# EAGLE board APDS-9960_RGB_and_Gesture_Sensor-Panel-v10 (EAGLE 7.1.0), part 1 of 3
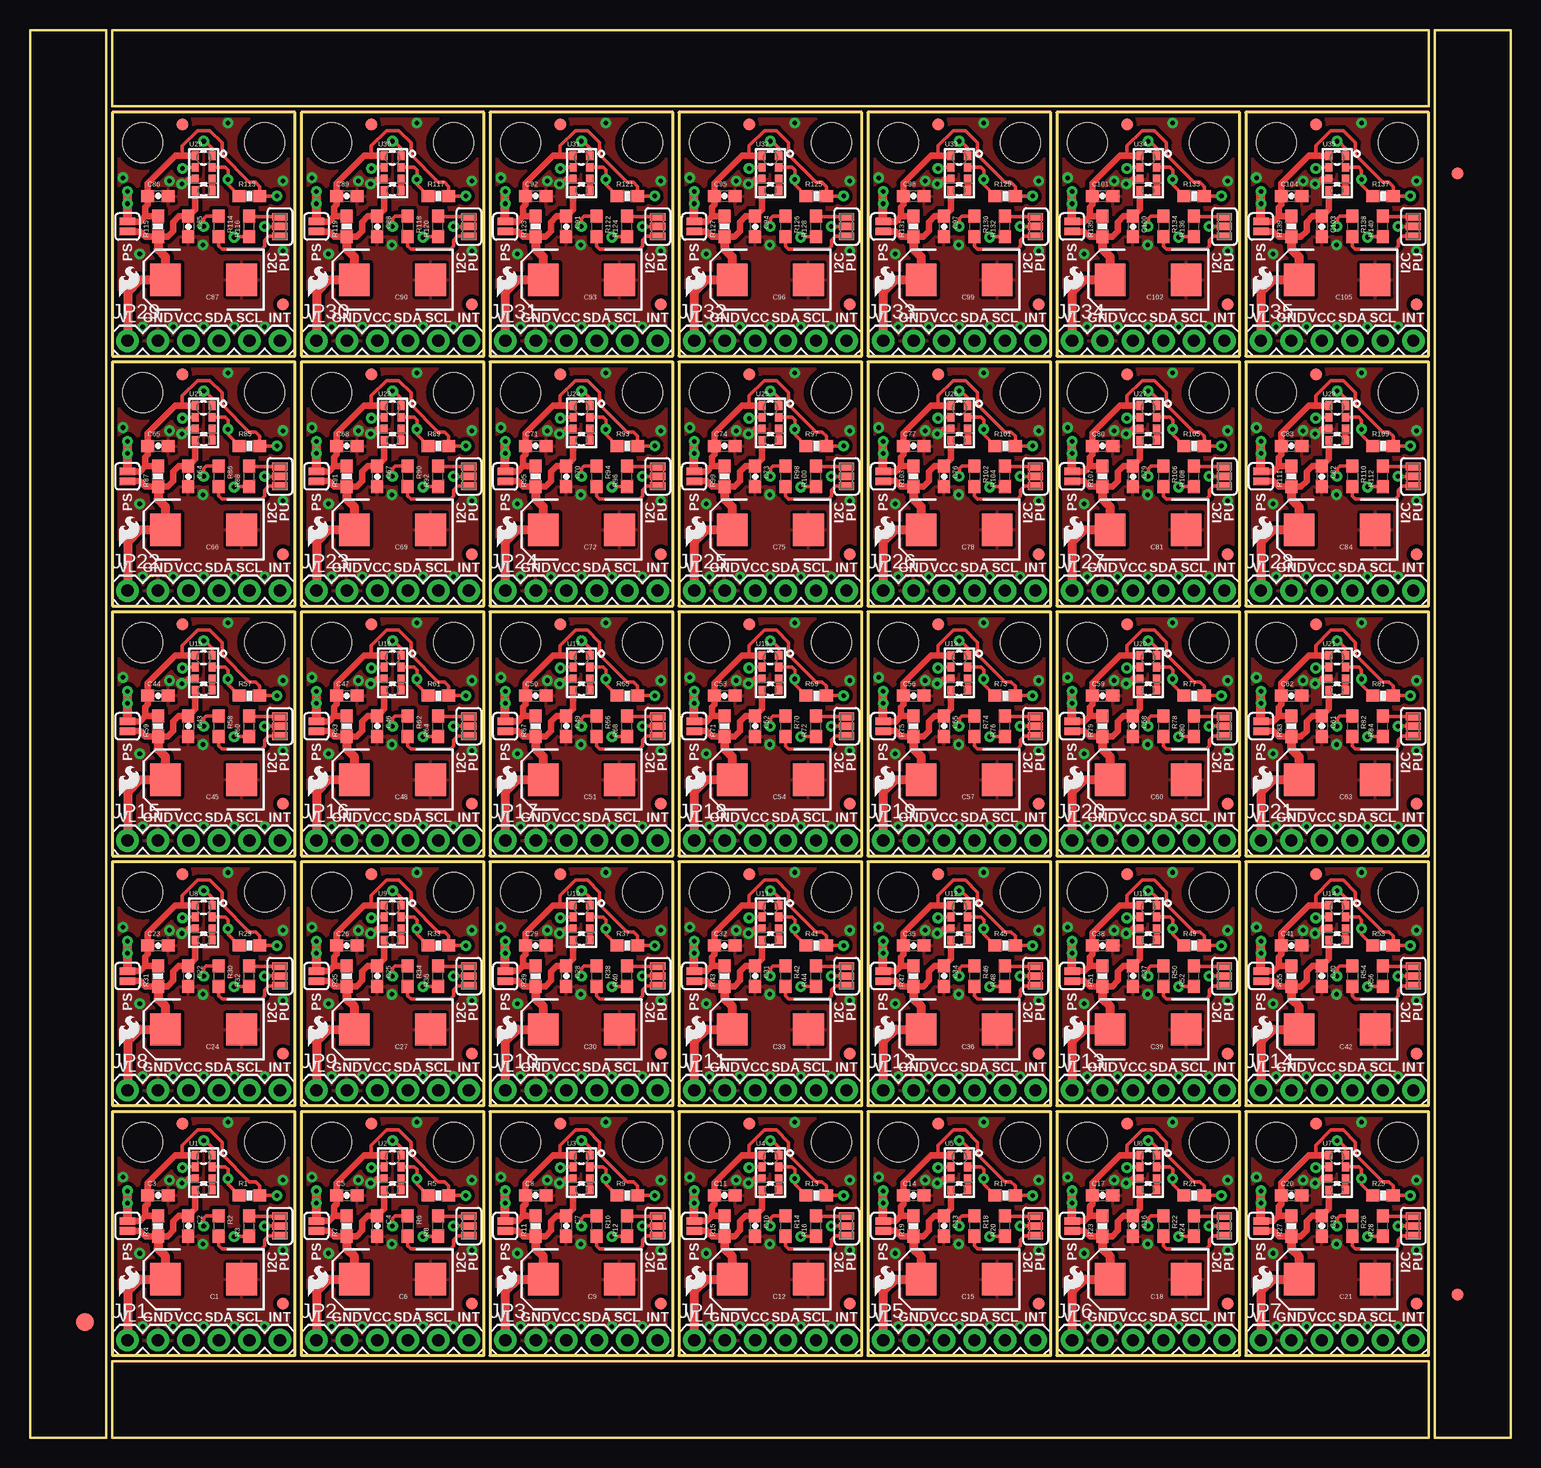
[diagram p0: board, top side]
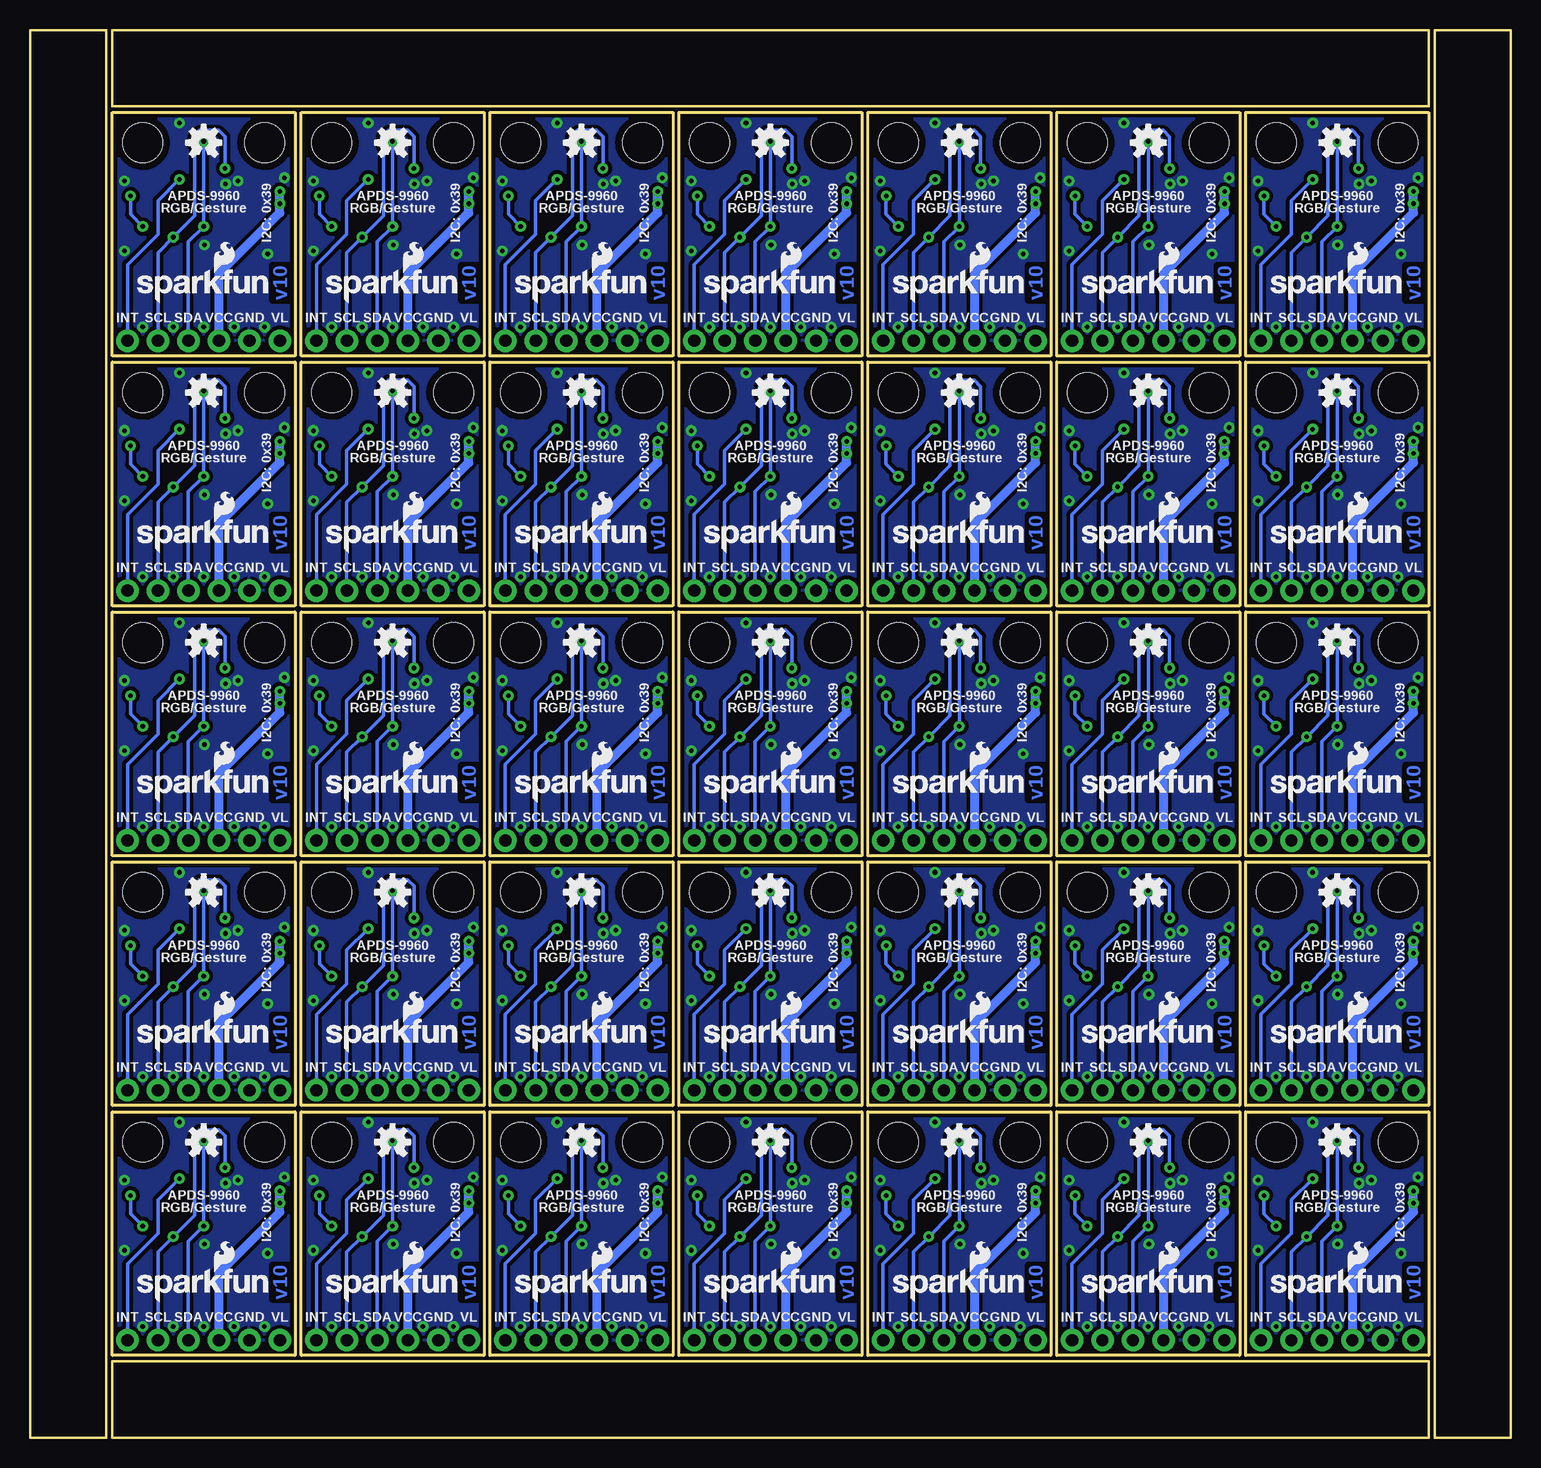
[diagram p1: board, bottom side, seen from below]

Size 123.44 x 117.35 mm. Coordinates in mm from the lower left corner, seen from the top.
Outline: 6.86,27.18 6.86,6.86 22.1,6.86 22.1,27.18 6.86,27.18
Outline: 22.61,27.18 22.61,6.86 37.85,6.86 37.85,27.18 22.61,27.18
Outline: 38.35,27.18 38.35,6.86 53.59,6.86 53.59,27.18 38.35,27.18
Outline: 54.1,27.18 54.1,6.86 69.34,6.86 69.34,27.18 54.1,27.18
Outline: 69.85,27.18 69.85,6.86 85.09,6.86 85.09,27.18 69.85,27.18
Outline: 85.6,27.18 85.6,6.86 100.84,6.86 100.84,27.18 85.6,27.18
Outline: 101.35,27.18 101.35,6.86 116.59,6.86 116.59,27.18 101.35,27.18
Outline: 6.86,48.01 6.86,27.69 22.1,27.69 22.1,48.01 6.86,48.01
Outline: 22.61,48.01 22.61,27.69 37.85,27.69 37.85,48.01 22.61,48.01
Outline: 38.35,48.01 38.35,27.69 53.59,27.69 53.59,48.01 38.35,48.01
Outline: 54.1,48.01 54.1,27.69 69.34,27.69 69.34,48.01 54.1,48.01
Outline: 69.85,48.01 69.85,27.69 85.09,27.69 85.09,48.01 69.85,48.01
Outline: 85.6,48.01 85.6,27.69 100.84,27.69 100.84,48.01 85.6,48.01
Outline: 101.35,48.01 101.35,27.69 116.59,27.69 116.59,48.01 101.35,48.01
Outline: 6.86,68.83 6.86,48.51 22.1,48.51 22.1,68.83 6.86,68.83
Outline: 22.61,68.83 22.61,48.51 37.85,48.51 37.85,68.83 22.61,68.83
Outline: 38.35,68.83 38.35,48.51 53.59,48.51 53.59,68.83 38.35,68.83
Outline: 54.1,68.83 54.1,48.51 69.34,48.51 69.34,68.83 54.1,68.83
Outline: 69.85,68.83 69.85,48.51 85.09,48.51 85.09,68.83 69.85,68.83
Outline: 85.6,68.83 85.6,48.51 100.84,48.51 100.84,68.83 85.6,68.83
Outline: 101.35,68.83 101.35,48.51 116.59,48.51 116.59,68.83 101.35,68.83
Outline: 6.86,89.66 6.86,69.34 22.1,69.34 22.1,89.66 6.86,89.66
Outline: 22.61,89.66 22.61,69.34 37.85,69.34 37.85,89.66 22.61,89.66
Outline: 38.35,89.66 38.35,69.34 53.59,69.34 53.59,89.66 38.35,89.66
Outline: 54.1,89.66 54.1,69.34 69.34,69.34 69.34,89.66 54.1,89.66
Outline: 69.85,89.66 69.85,69.34 85.09,69.34 85.09,89.66 69.85,89.66
Outline: 85.6,89.66 85.6,69.34 100.84,69.34 100.84,89.66 85.6,89.66
Outline: 101.35,89.66 101.35,69.34 116.59,69.34 116.59,89.66 101.35,89.66
Outline: 6.86,110.49 6.86,90.17 22.1,90.17 22.1,110.49 6.86,110.49
Outline: 22.61,110.49 22.61,90.17 37.85,90.17 37.85,110.49 22.61,110.49
Outline: 38.35,110.49 38.35,90.17 53.59,90.17 53.59,110.49 38.35,110.49
Outline: 54.1,110.49 54.1,90.17 69.34,90.17 69.34,110.49 54.1,110.49
Outline: 69.85,110.49 69.85,90.17 85.09,90.17 85.09,110.49 69.85,110.49
Outline: 85.6,110.49 85.6,90.17 100.84,90.17 100.84,110.49 85.6,110.49
Outline: 101.35,110.49 101.35,90.17 116.59,90.17 116.59,110.49 101.35,110.49
Outline: 6.35,0 6.35,117.35 0,117.35 0,0 6.35,0
Outline: 6.86,0 116.59,0 116.59,6.35 6.86,6.35 6.86,0
Outline: 123.44,0 123.44,117.35 117.09,117.35 117.09,0 123.44,0
Outline: 116.59,117.35 6.86,117.35 6.86,111 116.59,111 116.59,117.35
Copper layers (1*16): Top 0.035mm / dielectric 1.5mm / Bottom 0.035mm
Design rules "SparkFun-2-layer": minimum track width 7mil, minimum drill 15mil, track to track 8mil, track to pad 8mil, pad to pad 8mil, via to via 8mil, smd to smd 8mil, copper to edge 8mil, drill to drill 8mil, minimum pad ring 12mil, minimum via ring 10mil, stop-mask expansion 4mil, vias tented up to drill 20mil, thermal gap 10mil

## Footprints (pad centres in the part's own frame; a part is rotated, then mirrored left to right if it is on the bottom)
EIA7343 = smd 2.55 x 2.7: A 3.17,0; C -3.17,0
0603-CAP = smd 1.1 x 1: 1 -0.85,0; 2 0.85,0
FIDUCIAL-1.5X3 = smd 1.5 x 1.5: 1 0,0
FIDUCIAL-1X2 = smd 1 x 1: 1 0,0
1X06 = drill 1.016 pad 1.88: 1 0,0; 2 2.54,0; 3 5.08,0; 4 7.62,0; 5 10.16,0; 6 12.7,0
0603-RES = smd 1.1 x 1: 1 -0.85,0; 2 0.85,0
0603 = smd 1.1 x 1: 1 -0.85,0; 2 0.85,0
SJ_3_PASTE1&2&3 = smd 0.635 x 1.27: 1 -0.813,0; 2 0,0; 3 0.813,0
SJ_2S = smd 0.635 x 1.27: 1 -0.412,0; 2 0.412,0
STAND-OFF = hole 3.302: 0,0
APDS-9960 = smd 0.6 x 0.72: 1 0.7,1.455; 2 0.7,0.485; 3 0.7,-0.485; 4 0.7,-1.455; 5 -0.7,-1.455; 6 -0.7,-0.485; 7 -0.7,0.485; 8 -0.7,1.455

## Placement (x,y rotation side)
C1  100uF  [EIA7343]  14.48,13.21 180 top
C2  1.0uF  [0603-CAP]  13.21,17.65 270 top
C3  1.0uF  [0603-CAP]  10.67,20.19 0 top
C4  1.0uF  [0603-CAP]  28.96,17.65 270 top
C5  1.0uF  [0603-CAP]  26.42,20.19 0 top
C6  100uF  [EIA7343]  30.23,13.21 180 top
C7  1.0uF  [0603-CAP]  44.7,17.65 270 top
C8  1.0uF  [0603-CAP]  42.16,20.19 0 top
C9  100uF  [EIA7343]  45.97,13.21 180 top
C10  1.0uF  [0603-CAP]  60.45,17.65 270 top
C11  1.0uF  [0603-CAP]  57.91,20.19 0 top
C12  100uF  [EIA7343]  61.72,13.21 180 top
C13  1.0uF  [0603-CAP]  76.2,17.65 270 top
C14  1.0uF  [0603-CAP]  73.66,20.19 0 top
C15  100uF  [EIA7343]  77.47,13.21 180 top
C16  1.0uF  [0603-CAP]  91.95,17.65 270 top
C17  1.0uF  [0603-CAP]  89.41,20.19 0 top
C18  100uF  [EIA7343]  93.22,13.21 180 top
C19  1.0uF  [0603-CAP]  107.7,17.65 270 top
C20  1.0uF  [0603-CAP]  105.16,20.19 0 top
C21  100uF  [EIA7343]  108.97,13.21 180 top
C22  1.0uF  [0603-CAP]  13.21,38.48 270 top
C23  1.0uF  [0603-CAP]  10.67,41.02 0 top
C24  100uF  [EIA7343]  14.48,34.04 180 top
C25  1.0uF  [0603-CAP]  28.96,38.48 270 top
C26  1.0uF  [0603-CAP]  26.42,41.02 0 top
C27  100uF  [EIA7343]  30.23,34.04 180 top
C28  1.0uF  [0603-CAP]  44.7,38.48 270 top
C29  1.0uF  [0603-CAP]  42.16,41.02 0 top
C30  100uF  [EIA7343]  45.97,34.04 180 top
C31  1.0uF  [0603-CAP]  60.45,38.48 270 top
C32  1.0uF  [0603-CAP]  57.91,41.02 0 top
C33  100uF  [EIA7343]  61.72,34.04 180 top
C34  1.0uF  [0603-CAP]  76.2,38.48 270 top
C35  1.0uF  [0603-CAP]  73.66,41.02 0 top
C36  100uF  [EIA7343]  77.47,34.04 180 top
C37  1.0uF  [0603-CAP]  91.95,38.48 270 top
C38  1.0uF  [0603-CAP]  89.41,41.02 0 top
C39  100uF  [EIA7343]  93.22,34.04 180 top
C40  1.0uF  [0603-CAP]  107.7,38.48 270 top
C41  1.0uF  [0603-CAP]  105.16,41.02 0 top
C42  100uF  [EIA7343]  108.97,34.04 180 top
C43  1.0uF  [0603-CAP]  13.21,59.31 270 top
C44  1.0uF  [0603-CAP]  10.67,61.85 0 top
C45  100uF  [EIA7343]  14.48,54.86 180 top
C46  1.0uF  [0603-CAP]  28.96,59.31 270 top
C47  1.0uF  [0603-CAP]  26.42,61.85 0 top
C48  100uF  [EIA7343]  30.23,54.86 180 top
C49  1.0uF  [0603-CAP]  44.7,59.31 270 top
C50  1.0uF  [0603-CAP]  42.16,61.85 0 top
C51  100uF  [EIA7343]  45.97,54.86 180 top
C52  1.0uF  [0603-CAP]  60.45,59.31 270 top
C53  1.0uF  [0603-CAP]  57.91,61.85 0 top
C54  100uF  [EIA7343]  61.72,54.86 180 top
C55  1.0uF  [0603-CAP]  76.2,59.31 270 top
C56  1.0uF  [0603-CAP]  73.66,61.85 0 top
C57  100uF  [EIA7343]  77.47,54.86 180 top
C58  1.0uF  [0603-CAP]  91.95,59.31 270 top
C59  1.0uF  [0603-CAP]  89.41,61.85 0 top
C60  100uF  [EIA7343]  93.22,54.86 180 top
C61  1.0uF  [0603-CAP]  107.7,59.31 270 top
C62  1.0uF  [0603-CAP]  105.16,61.85 0 top
C63  100uF  [EIA7343]  108.97,54.86 180 top
C64  1.0uF  [0603-CAP]  13.21,80.14 270 top
C65  1.0uF  [0603-CAP]  10.67,82.68 0 top
C66  100uF  [EIA7343]  14.48,75.69 180 top
C67  1.0uF  [0603-CAP]  28.96,80.14 270 top
C68  1.0uF  [0603-CAP]  26.42,82.68 0 top
C69  100uF  [EIA7343]  30.23,75.69 180 top
C70  1.0uF  [0603-CAP]  44.7,80.14 270 top
C71  1.0uF  [0603-CAP]  42.16,82.68 0 top
C72  100uF  [EIA7343]  45.97,75.69 180 top
C73  1.0uF  [0603-CAP]  60.45,80.14 270 top
C74  1.0uF  [0603-CAP]  57.91,82.68 0 top
C75  100uF  [EIA7343]  61.72,75.69 180 top
C76  1.0uF  [0603-CAP]  76.2,80.14 270 top
C77  1.0uF  [0603-CAP]  73.66,82.68 0 top
C78  100uF  [EIA7343]  77.47,75.69 180 top
C79  1.0uF  [0603-CAP]  91.95,80.14 270 top
C80  1.0uF  [0603-CAP]  89.41,82.68 0 top
C81  100uF  [EIA7343]  93.22,75.69 180 top
C82  1.0uF  [0603-CAP]  107.7,80.14 270 top
C83  1.0uF  [0603-CAP]  105.16,82.68 0 top
C84  100uF  [EIA7343]  108.97,75.69 180 top
C85  1.0uF  [0603-CAP]  13.21,100.97 270 top
C86  1.0uF  [0603-CAP]  10.67,103.5 0 top
C87  100uF  [EIA7343]  14.48,96.52 180 top
C88  1.0uF  [0603-CAP]  28.96,100.97 270 top
C89  1.0uF  [0603-CAP]  26.42,103.5 0 top
C90  100uF  [EIA7343]  30.23,96.52 180 top
C91  1.0uF  [0603-CAP]  44.7,100.97 270 top
C92  1.0uF  [0603-CAP]  42.16,103.5 0 top
C93  100uF  [EIA7343]  45.97,96.52 180 top
C94  1.0uF  [0603-CAP]  60.45,100.97 270 top
C95  1.0uF  [0603-CAP]  57.91,103.5 0 top
C96  100uF  [EIA7343]  61.72,96.52 180 top
C97  1.0uF  [0603-CAP]  76.2,100.97 270 top
C98  1.0uF  [0603-CAP]  73.66,103.5 0 top
C99  100uF  [EIA7343]  77.47,96.52 180 top
C100  1.0uF  [0603-CAP]  91.95,100.97 270 top
C101  1.0uF  [0603-CAP]  89.41,103.5 0 top
C102  100uF  [EIA7343]  93.22,96.52 180 top
C103  1.0uF  [0603-CAP]  107.7,100.97 270 top
C104  1.0uF  [0603-CAP]  105.16,103.5 0 top
C105  100uF  [EIA7343]  108.97,96.52 180 top
E$1  [FIDUCIAL-1.5X3]  4.57,9.65 0 top
E$4  [FIDUCIAL-1X2]  119,11.94 0 top
E$6  [FIDUCIAL-1X2]  119,105.41 180 top
FID1  FIDUCIAL1X2  [FIDUCIAL-1X2]  21.08,11.18 0 top
FID2  FIDUCIAL1X2  [FIDUCIAL-1X2]  12.7,26.16 0 top
FID3  FIDUCIAL1X2  [FIDUCIAL-1X2]  36.83,11.18 0 top
FID4  FIDUCIAL1X2  [FIDUCIAL-1X2]  28.45,26.16 0 top
FID5  FIDUCIAL1X2  [FIDUCIAL-1X2]  52.58,11.18 0 top
FID6  FIDUCIAL1X2  [FIDUCIAL-1X2]  44.2,26.16 0 top
FID7  FIDUCIAL1X2  [FIDUCIAL-1X2]  68.33,11.18 0 top
FID8  FIDUCIAL1X2  [FIDUCIAL-1X2]  59.94,26.16 0 top
FID9  FIDUCIAL1X2  [FIDUCIAL-1X2]  84.07,11.18 0 top
FID10  FIDUCIAL1X2  [FIDUCIAL-1X2]  75.69,26.16 0 top
FID11  FIDUCIAL1X2  [FIDUCIAL-1X2]  99.82,11.18 0 top
FID12  FIDUCIAL1X2  [FIDUCIAL-1X2]  91.44,26.16 0 top
FID13  FIDUCIAL1X2  [FIDUCIAL-1X2]  115.57,11.18 0 top
FID14  FIDUCIAL1X2  [FIDUCIAL-1X2]  107.19,26.16 0 top
FID15  FIDUCIAL1X2  [FIDUCIAL-1X2]  21.08,32 0 top
FID16  FIDUCIAL1X2  [FIDUCIAL-1X2]  12.7,46.99 0 top
FID17  FIDUCIAL1X2  [FIDUCIAL-1X2]  36.83,32 0 top
FID18  FIDUCIAL1X2  [FIDUCIAL-1X2]  28.45,46.99 0 top
FID19  FIDUCIAL1X2  [FIDUCIAL-1X2]  52.58,32 0 top
FID20  FIDUCIAL1X2  [FIDUCIAL-1X2]  44.2,46.99 0 top
FID21  FIDUCIAL1X2  [FIDUCIAL-1X2]  68.33,32 0 top
FID22  FIDUCIAL1X2  [FIDUCIAL-1X2]  59.94,46.99 0 top
FID23  FIDUCIAL1X2  [FIDUCIAL-1X2]  84.07,32 0 top
FID24  FIDUCIAL1X2  [FIDUCIAL-1X2]  75.69,46.99 0 top
FID25  FIDUCIAL1X2  [FIDUCIAL-1X2]  99.82,32 0 top
FID26  FIDUCIAL1X2  [FIDUCIAL-1X2]  91.44,46.99 0 top
FID27  FIDUCIAL1X2  [FIDUCIAL-1X2]  115.57,32 0 top
FID28  FIDUCIAL1X2  [FIDUCIAL-1X2]  107.19,46.99 0 top
FID29  FIDUCIAL1X2  [FIDUCIAL-1X2]  21.08,52.83 0 top
FID30  FIDUCIAL1X2  [FIDUCIAL-1X2]  12.7,67.82 0 top
FID31  FIDUCIAL1X2  [FIDUCIAL-1X2]  36.83,52.83 0 top
FID32  FIDUCIAL1X2  [FIDUCIAL-1X2]  28.45,67.82 0 top
FID33  FIDUCIAL1X2  [FIDUCIAL-1X2]  52.58,52.83 0 top
FID34  FIDUCIAL1X2  [FIDUCIAL-1X2]  44.2,67.82 0 top
FID35  FIDUCIAL1X2  [FIDUCIAL-1X2]  68.33,52.83 0 top
FID36  FIDUCIAL1X2  [FIDUCIAL-1X2]  59.94,67.82 0 top
FID37  FIDUCIAL1X2  [FIDUCIAL-1X2]  84.07,52.83 0 top
FID38  FIDUCIAL1X2  [FIDUCIAL-1X2]  75.69,67.82 0 top
FID39  FIDUCIAL1X2  [FIDUCIAL-1X2]  99.82,52.83 0 top
FID40  FIDUCIAL1X2  [FIDUCIAL-1X2]  91.44,67.82 0 top
FID41  FIDUCIAL1X2  [FIDUCIAL-1X2]  115.57,52.83 0 top
FID42  FIDUCIAL1X2  [FIDUCIAL-1X2]  107.19,67.82 0 top
FID43  FIDUCIAL1X2  [FIDUCIAL-1X2]  21.08,73.66 0 top
FID44  FIDUCIAL1X2  [FIDUCIAL-1X2]  12.7,88.65 0 top
FID45  FIDUCIAL1X2  [FIDUCIAL-1X2]  36.83,73.66 0 top
FID46  FIDUCIAL1X2  [FIDUCIAL-1X2]  28.45,88.65 0 top
FID47  FIDUCIAL1X2  [FIDUCIAL-1X2]  52.58,73.66 0 top
FID48  FIDUCIAL1X2  [FIDUCIAL-1X2]  44.2,88.65 0 top
FID49  FIDUCIAL1X2  [FIDUCIAL-1X2]  68.33,73.66 0 top
FID50  FIDUCIAL1X2  [FIDUCIAL-1X2]  59.94,88.65 0 top
FID51  FIDUCIAL1X2  [FIDUCIAL-1X2]  84.07,73.66 0 top
FID52  FIDUCIAL1X2  [FIDUCIAL-1X2]  75.69,88.65 0 top
FID53  FIDUCIAL1X2  [FIDUCIAL-1X2]  99.82,73.66 0 top
FID54  FIDUCIAL1X2  [FIDUCIAL-1X2]  91.44,88.65 0 top
FID55  FIDUCIAL1X2  [FIDUCIAL-1X2]  115.57,73.66 0 top
FID56  FIDUCIAL1X2  [FIDUCIAL-1X2]  107.19,88.65 0 top
FID57  FIDUCIAL1X2  [FIDUCIAL-1X2]  21.08,94.49 0 top
FID58  FIDUCIAL1X2  [FIDUCIAL-1X2]  12.7,109.47 0 top
FID59  FIDUCIAL1X2  [FIDUCIAL-1X2]  36.83,94.49 0 top
FID60  FIDUCIAL1X2  [FIDUCIAL-1X2]  28.45,109.47 0 top
FID61  FIDUCIAL1X2  [FIDUCIAL-1X2]  52.58,94.49 0 top
FID62  FIDUCIAL1X2  [FIDUCIAL-1X2]  44.2,109.47 0 top
FID63  FIDUCIAL1X2  [FIDUCIAL-1X2]  68.33,94.49 0 top
FID64  FIDUCIAL1X2  [FIDUCIAL-1X2]  59.94,109.47 0 top
FID65  FIDUCIAL1X2  [FIDUCIAL-1X2]  84.07,94.49 0 top
FID66  FIDUCIAL1X2  [FIDUCIAL-1X2]  75.69,109.47 0 top
FID67  FIDUCIAL1X2  [FIDUCIAL-1X2]  99.82,94.49 0 top
FID68  FIDUCIAL1X2  [FIDUCIAL-1X2]  91.44,109.47 0 top
FID69  FIDUCIAL1X2  [FIDUCIAL-1X2]  115.57,94.49 0 top
FID70  FIDUCIAL1X2  [FIDUCIAL-1X2]  107.19,109.47 0 top
JP1  [1X06]  8.13,8.13 0 top
JP2  [1X06]  23.88,8.13 0 top
JP3  [1X06]  39.62,8.13 0 top
JP4  [1X06]  55.37,8.13 0 top
JP5  [1X06]  71.12,8.13 0 top
JP6  [1X06]  86.87,8.13 0 top
JP7  [1X06]  102.62,8.13 0 top
JP8  [1X06]  8.13,28.96 0 top
JP9  [1X06]  23.88,28.96 0 top
JP10  [1X06]  39.62,28.96 0 top
JP11  [1X06]  55.37,28.96 0 top
JP12  [1X06]  71.12,28.96 0 top
JP13  [1X06]  86.87,28.96 0 top
JP14  [1X06]  102.62,28.96 0 top
JP15  [1X06]  8.13,49.78 0 top
JP16  [1X06]  23.88,49.78 0 top
JP17  [1X06]  39.62,49.78 0 top
JP18  [1X06]  55.37,49.78 0 top
JP19  [1X06]  71.12,49.78 0 top
JP20  [1X06]  86.87,49.78 0 top
JP21  [1X06]  102.62,49.78 0 top
JP22  [1X06]  8.13,70.61 0 top
JP23  [1X06]  23.88,70.61 0 top
JP24  [1X06]  39.62,70.61 0 top
JP25  [1X06]  55.37,70.61 0 top
JP26  [1X06]  71.12,70.61 0 top
JP27  [1X06]  86.87,70.61 0 top
JP28  [1X06]  102.62,70.61 0 top
JP29  [1X06]  8.13,91.44 0 top
JP30  [1X06]  23.88,91.44 0 top
JP31  [1X06]  39.62,91.44 0 top
JP32  [1X06]  55.37,91.44 0 top
JP33  [1X06]  71.12,91.44 0 top
JP34  [1X06]  86.87,91.44 0 top
JP35  [1X06]  102.62,91.44 0 top
LOGO1  SFE_LOGO_FLAME.1_INCH  [SFE_LOGO_FLAME_.1]  7.11,11.43 0 top
LOGO2  OSHW-LOGOS  [OSHW-LOGO-S]  14.48,24.64 0 bottom
LOGO3  SFE_LOGO_FLAME.1_INCH  [SFE_LOGO_FLAME_.1]  22.86,11.43 0 top
LOGO4  OSHW-LOGOS  [OSHW-LOGO-S]  30.23,24.64 0 bottom
LOGO5  SFE_LOGO_FLAME.1_INCH  [SFE_LOGO_FLAME_.1]  38.61,11.43 0 top
LOGO6  OSHW-LOGOS  [OSHW-LOGO-S]  45.97,24.64 0 bottom
LOGO7  SFE_LOGO_FLAME.1_INCH  [SFE_LOGO_FLAME_.1]  54.36,11.43 0 top
LOGO8  OSHW-LOGOS  [OSHW-LOGO-S]  61.72,24.64 0 bottom
LOGO9  SFE_LOGO_FLAME.1_INCH  [SFE_LOGO_FLAME_.1]  70.1,11.43 0 top
LOGO10  OSHW-LOGOS  [OSHW-LOGO-S]  77.47,24.64 0 bottom
LOGO11  SFE_LOGO_FLAME.1_INCH  [SFE_LOGO_FLAME_.1]  85.85,11.43 0 top
LOGO12  OSHW-LOGOS  [OSHW-LOGO-S]  93.22,24.64 0 bottom
LOGO13  SFE_LOGO_FLAME.1_INCH  [SFE_LOGO_FLAME_.1]  101.6,11.43 0 top
LOGO14  OSHW-LOGOS  [OSHW-LOGO-S]  108.97,24.64 0 bottom
LOGO15  SFE_LOGO_FLAME.1_INCH  [SFE_LOGO_FLAME_.1]  7.11,32.26 0 top
LOGO16  OSHW-LOGOS  [OSHW-LOGO-S]  14.48,45.47 0 bottom
LOGO17  SFE_LOGO_FLAME.1_INCH  [SFE_LOGO_FLAME_.1]  22.86,32.26 0 top
LOGO18  OSHW-LOGOS  [OSHW-LOGO-S]  30.23,45.47 0 bottom
LOGO19  SFE_LOGO_FLAME.1_INCH  [SFE_LOGO_FLAME_.1]  38.61,32.26 0 top
LOGO20  OSHW-LOGOS  [OSHW-LOGO-S]  45.97,45.47 0 bottom
LOGO21  SFE_LOGO_FLAME.1_INCH  [SFE_LOGO_FLAME_.1]  54.36,32.26 0 top
LOGO22  OSHW-LOGOS  [OSHW-LOGO-S]  61.72,45.47 0 bottom
LOGO23  SFE_LOGO_FLAME.1_INCH  [SFE_LOGO_FLAME_.1]  70.1,32.26 0 top
LOGO24  OSHW-LOGOS  [OSHW-LOGO-S]  77.47,45.47 0 bottom
LOGO25  SFE_LOGO_FLAME.1_INCH  [SFE_LOGO_FLAME_.1]  85.85,32.26 0 top
LOGO26  OSHW-LOGOS  [OSHW-LOGO-S]  93.22,45.47 0 bottom
LOGO27  SFE_LOGO_FLAME.1_INCH  [SFE_LOGO_FLAME_.1]  101.6,32.26 0 top
LOGO28  OSHW-LOGOS  [OSHW-LOGO-S]  108.97,45.47 0 bottom
LOGO29  SFE_LOGO_FLAME.1_INCH  [SFE_LOGO_FLAME_.1]  7.11,53.09 0 top
LOGO30  OSHW-LOGOS  [OSHW-LOGO-S]  14.48,66.29 0 bottom
LOGO31  SFE_LOGO_FLAME.1_INCH  [SFE_LOGO_FLAME_.1]  22.86,53.09 0 top
LOGO32  OSHW-LOGOS  [OSHW-LOGO-S]  30.23,66.29 0 bottom
LOGO33  SFE_LOGO_FLAME.1_INCH  [SFE_LOGO_FLAME_.1]  38.61,53.09 0 top
LOGO34  OSHW-LOGOS  [OSHW-LOGO-S]  45.97,66.29 0 bottom
LOGO35  SFE_LOGO_FLAME.1_INCH  [SFE_LOGO_FLAME_.1]  54.36,53.09 0 top
LOGO36  OSHW-LOGOS  [OSHW-LOGO-S]  61.72,66.29 0 bottom
LOGO37  SFE_LOGO_FLAME.1_INCH  [SFE_LOGO_FLAME_.1]  70.1,53.09 0 top
LOGO38  OSHW-LOGOS  [OSHW-LOGO-S]  77.47,66.29 0 bottom
LOGO39  SFE_LOGO_FLAME.1_INCH  [SFE_LOGO_FLAME_.1]  85.85,53.09 0 top
LOGO40  OSHW-LOGOS  [OSHW-LOGO-S]  93.22,66.29 0 bottom
LOGO41  SFE_LOGO_FLAME.1_INCH  [SFE_LOGO_FLAME_.1]  101.6,53.09 0 top
LOGO42  OSHW-LOGOS  [OSHW-LOGO-S]  108.97,66.29 0 bottom
LOGO43  SFE_LOGO_FLAME.1_INCH  [SFE_LOGO_FLAME_.1]  7.11,73.91 0 top
LOGO44  OSHW-LOGOS  [OSHW-LOGO-S]  14.48,87.12 0 bottom
LOGO45  SFE_LOGO_FLAME.1_INCH  [SFE_LOGO_FLAME_.1]  22.86,73.91 0 top
LOGO46  OSHW-LOGOS  [OSHW-LOGO-S]  30.23,87.12 0 bottom
LOGO47  SFE_LOGO_FLAME.1_INCH  [SFE_LOGO_FLAME_.1]  38.61,73.91 0 top
LOGO48  OSHW-LOGOS  [OSHW-LOGO-S]  45.97,87.12 0 bottom
LOGO49  SFE_LOGO_FLAME.1_INCH  [SFE_LOGO_FLAME_.1]  54.36,73.91 0 top
LOGO50  OSHW-LOGOS  [OSHW-LOGO-S]  61.72,87.12 0 bottom
LOGO51  SFE_LOGO_FLAME.1_INCH  [SFE_LOGO_FLAME_.1]  70.1,73.91 0 top
LOGO52  OSHW-LOGOS  [OSHW-LOGO-S]  77.47,87.12 0 bottom
LOGO53  SFE_LOGO_FLAME.1_INCH  [SFE_LOGO_FLAME_.1]  85.85,73.91 0 top
LOGO54  OSHW-LOGOS  [OSHW-LOGO-S]  93.22,87.12 0 bottom
LOGO55  SFE_LOGO_FLAME.1_INCH  [SFE_LOGO_FLAME_.1]  101.6,73.91 0 top
LOGO56  OSHW-LOGOS  [OSHW-LOGO-S]  108.97,87.12 0 bottom
LOGO57  SFE_LOGO_FLAME.1_INCH  [SFE_LOGO_FLAME_.1]  7.11,94.74 0 top
LOGO58  OSHW-LOGOS  [OSHW-LOGO-S]  14.48,107.95 0 bottom
LOGO59  SFE_LOGO_FLAME.1_INCH  [SFE_LOGO_FLAME_.1]  22.86,94.74 0 top
LOGO60  OSHW-LOGOS  [OSHW-LOGO-S]  30.23,107.95 0 bottom
LOGO61  SFE_LOGO_FLAME.1_INCH  [SFE_LOGO_FLAME_.1]  38.61,94.74 0 top
LOGO62  OSHW-LOGOS  [OSHW-LOGO-S]  45.97,107.95 0 bottom
LOGO63  SFE_LOGO_FLAME.1_INCH  [SFE_LOGO_FLAME_.1]  54.36,94.74 0 top
LOGO64  OSHW-LOGOS  [OSHW-LOGO-S]  61.72,107.95 0 bottom
LOGO65  SFE_LOGO_FLAME.1_INCH  [SFE_LOGO_FLAME_.1]  70.1,94.74 0 top
LOGO66  OSHW-LOGOS  [OSHW-LOGO-S]  77.47,107.95 0 bottom
LOGO67  SFE_LOGO_FLAME.1_INCH  [SFE_LOGO_FLAME_.1]  85.85,94.74 0 top
LOGO68  OSHW-LOGOS  [OSHW-LOGO-S]  93.22,107.95 0 bottom
LOGO69  SFE_LOGO_FLAME.1_INCH  [SFE_LOGO_FLAME_.1]  101.6,94.74 0 top
LOGO70  OSHW-LOGOS  [OSHW-LOGO-S]  108.97,107.95 0 bottom
R1  10k  [0603-RES]  18.29,20.19 0 top
R2  4.7k  [0603]  15.75,17.65 270 top
R3  4.7k  [0603]  18.29,17.65 90 top
R4  DNP  [0603-RES]  10.67,17.65 90 top
R5  10k  [0603-RES]  34.04,20.19 0 top
R6  4.7k  [0603]  31.5,17.65 270 top
R7  DNP  [0603-RES]  26.42,17.65 90 top
R8  4.7k  [0603]  34.04,17.65 90 top
R9  10k  [0603-RES]  49.78,20.19 0 top
R10  4.7k  [0603]  47.24,17.65 270 top
R11  DNP  [0603-RES]  42.16,17.65 90 top
R12  4.7k  [0603]  49.78,17.65 90 top
R13  10k  [0603-RES]  65.53,20.19 0 top
R14  4.7k  [0603]  62.99,17.65 270 top
R15  DNP  [0603-RES]  57.91,17.65 90 top
R16  4.7k  [0603]  65.53,17.65 90 top
R17  10k  [0603-RES]  81.28,20.19 0 top
R18  4.7k  [0603]  78.74,17.65 270 top
R19  DNP  [0603-RES]  73.66,17.65 90 top
R20  4.7k  [0603]  81.28,17.65 90 top
R21  10k  [0603-RES]  97.03,20.19 0 top
R22  4.7k  [0603]  94.49,17.65 270 top
R23  DNP  [0603-RES]  89.41,17.65 90 top
R24  4.7k  [0603]  97.03,17.65 90 top
R25  10k  [0603-RES]  112.78,20.19 0 top
R26  4.7k  [0603]  110.24,17.65 270 top
R27  DNP  [0603-RES]  105.16,17.65 90 top
R28  4.7k  [0603]  112.78,17.65 90 top
R29  10k  [0603-RES]  18.29,41.02 0 top
R30  4.7k  [0603]  15.75,38.48 270 top
R31  DNP  [0603-RES]  10.67,38.48 90 top
R32  4.7k  [0603]  18.29,38.48 90 top
R33  10k  [0603-RES]  34.04,41.02 0 top
R34  4.7k  [0603]  31.5,38.48 270 top
R35  DNP  [0603-RES]  26.42,38.48 90 top
R36  4.7k  [0603]  34.04,38.48 90 top
R37  10k  [0603-RES]  49.78,41.02 0 top
R38  4.7k  [0603]  47.24,38.48 270 top
R39  DNP  [0603-RES]  42.16,38.48 90 top
R40  4.7k  [0603]  49.78,38.48 90 top
R41  10k  [0603-RES]  65.53,41.02 0 top
R42  4.7k  [0603]  62.99,38.48 270 top
R43  DNP  [0603-RES]  57.91,38.48 90 top
R44  4.7k  [0603]  65.53,38.48 90 top
R45  10k  [0603-RES]  81.28,41.02 0 top
R46  4.7k  [0603]  78.74,38.48 270 top
R47  DNP  [0603-RES]  73.66,38.48 90 top
R48  4.7k  [0603]  81.28,38.48 90 top
R49  10k  [0603-RES]  97.03,41.02 0 top
R50  4.7k  [0603]  94.49,38.48 270 top
R51  DNP  [0603-RES]  89.41,38.48 90 top
R52  4.7k  [0603]  97.03,38.48 90 top
R53  10k  [0603-RES]  112.78,41.02 0 top
R54  4.7k  [0603]  110.24,38.48 270 top
R55  DNP  [0603-RES]  105.16,38.48 90 top
R56  4.7k  [0603]  112.78,38.48 90 top
R57  10k  [0603-RES]  18.29,61.85 0 top
R58  4.7k  [0603]  15.75,59.31 270 top
R59  DNP  [0603-RES]  10.67,59.31 90 top
R60  4.7k  [0603]  18.29,59.31 90 top
R61  10k  [0603-RES]  34.04,61.85 0 top
R62  4.7k  [0603]  31.5,59.31 270 top
R63  DNP  [0603-RES]  26.42,59.31 90 top
R64  4.7k  [0603]  34.04,59.31 90 top
R65  10k  [0603-RES]  49.78,61.85 0 top
R66  4.7k  [0603]  47.24,59.31 270 top
R67  DNP  [0603-RES]  42.16,59.31 90 top
R68  4.7k  [0603]  49.78,59.31 90 top
R69  10k  [0603-RES]  65.53,61.85 0 top
R70  4.7k  [0603]  62.99,59.31 270 top
R71  DNP  [0603-RES]  57.91,59.31 90 top
R72  4.7k  [0603]  65.53,59.31 90 top
R73  10k  [0603-RES]  81.28,61.85 0 top
R74  4.7k  [0603]  78.74,59.31 270 top
R75  DNP  [0603-RES]  73.66,59.31 90 top
R76  4.7k  [0603]  81.28,59.31 90 top
R77  10k  [0603-RES]  97.03,61.85 0 top
R78  4.7k  [0603]  94.49,59.31 270 top
R79  DNP  [0603-RES]  89.41,59.31 90 top
R80  4.7k  [0603]  97.03,59.31 90 top
R81  10k  [0603-RES]  112.78,61.85 0 top
R82  4.7k  [0603]  110.24,59.31 270 top
R83  DNP  [0603-RES]  105.16,59.31 90 top
R84  4.7k  [0603]  112.78,59.31 90 top
R85  10k  [0603-RES]  18.29,82.68 0 top
R86  4.7k  [0603]  15.75,80.14 270 top
R87  DNP  [0603-RES]  10.67,80.14 90 top
R88  4.7k  [0603]  18.29,80.14 90 top
R89  10k  [0603-RES]  34.04,82.68 0 top
R90  4.7k  [0603]  31.5,80.14 270 top
R91  DNP  [0603-RES]  26.42,80.14 90 top
R92  4.7k  [0603]  34.04,80.14 90 top
R93  10k  [0603-RES]  49.78,82.68 0 top
R94  4.7k  [0603]  47.24,80.14 270 top
R95  DNP  [0603-RES]  42.16,80.14 90 top
R96  4.7k  [0603]  49.78,80.14 90 top
R97  10k  [0603-RES]  65.53,82.68 0 top
R98  4.7k  [0603]  62.99,80.14 270 top
R99  DNP  [0603-RES]  57.91,80.14 90 top
R100  4.7k  [0603]  65.53,80.14 90 top
R101  10k  [0603-RES]  81.28,82.68 0 top
R102  4.7k  [0603]  78.74,80.14 270 top
R103  DNP  [0603-RES]  73.66,80.14 90 top
R104  4.7k  [0603]  81.28,80.14 90 top
R105  10k  [0603-RES]  97.03,82.68 0 top
R106  4.7k  [0603]  94.49,80.14 270 top
R107  DNP  [0603-RES]  89.41,80.14 90 top
R108  4.7k  [0603]  97.03,80.14 90 top
R109  10k  [0603-RES]  112.78,82.68 0 top
R110  4.7k  [0603]  110.24,80.14 270 top
R111  DNP  [0603-RES]  105.16,80.14 90 top
R112  4.7k  [0603]  112.78,80.14 90 top
R113  10k  [0603-RES]  18.29,103.5 0 top
R114  4.7k  [0603]  15.75,100.97 270 top
R115  DNP  [0603-RES]  10.67,100.97 90 top
R116  4.7k  [0603]  18.29,100.97 90 top
R117  10k  [0603-RES]  34.04,103.5 0 top
R118  4.7k  [0603]  31.5,100.97 270 top
R119  DNP  [0603-RES]  26.42,100.97 90 top
R120  4.7k  [0603]  34.04,100.97 90 top
R121  10k  [0603-RES]  49.78,103.5 0 top
R122  4.7k  [0603]  47.24,100.97 270 top
R123  DNP  [0603-RES]  42.16,100.97 90 top
R124  4.7k  [0603]  49.78,100.97 90 top
R125  10k  [0603-RES]  65.53,103.5 0 top
R126  4.7k  [0603]  62.99,100.97 270 top
R127  DNP  [0603-RES]  57.91,100.97 90 top
R128  4.7k  [0603]  65.53,100.97 90 top
R129  10k  [0603-RES]  81.28,103.5 0 top
R130  4.7k  [0603]  78.74,100.97 270 top
R131  DNP  [0603-RES]  73.66,100.97 90 top
R132  4.7k  [0603]  81.28,100.97 90 top
R133  10k  [0603-RES]  97.03,103.5 0 top
R134  4.7k  [0603]  94.49,100.97 270 top
R135  DNP  [0603-RES]  89.41,100.97 90 top
R136  4.7k  [0603]  97.03,100.97 90 top
R137  10k  [0603-RES]  112.78,103.5 0 top
R138  4.7k  [0603]  110.24,100.97 270 top
R139  DNP  [0603-RES]  105.16,100.97 90 top
R140  4.7k  [0603]  112.78,100.97 90 top
SJ1  [SJ_3_PASTE1&2&3]  20.83,17.65 270 top
SJ2  SOLDERJUMPERNC  [SJ_2S]  8.13,17.65 90 top
SJ3  [SJ_3_PASTE1&2&3]  36.58,17.65 270 top
SJ4  SOLDERJUMPERNC  [SJ_2S]  23.88,17.65 90 top
SJ5  [SJ_3_PASTE1&2&3]  52.32,17.65 270 top
SJ6  SOLDERJUMPERNC  [SJ_2S]  39.62,17.65 90 top
SJ7  [SJ_3_PASTE1&2&3]  68.07,17.65 270 top
SJ8  SOLDERJUMPERNC  [SJ_2S]  55.37,17.65 90 top
SJ9  [SJ_3_PASTE1&2&3]  83.82,17.65 270 top
SJ10  SOLDERJUMPERNC  [SJ_2S]  71.12,17.65 90 top
SJ11  [SJ_3_PASTE1&2&3]  99.57,17.65 270 top
SJ12  SOLDERJUMPERNC  [SJ_2S]  86.87,17.65 90 top
SJ13  [SJ_3_PASTE1&2&3]  115.32,17.65 270 top
SJ14  SOLDERJUMPERNC  [SJ_2S]  102.62,17.65 90 top
SJ15  [SJ_3_PASTE1&2&3]  20.83,38.48 270 top
SJ16  SOLDERJUMPERNC  [SJ_2S]  8.13,38.48 90 top
SJ17  [SJ_3_PASTE1&2&3]  36.58,38.48 270 top
SJ18  SOLDERJUMPERNC  [SJ_2S]  23.88,38.48 90 top
SJ19  [SJ_3_PASTE1&2&3]  52.32,38.48 270 top
SJ20  SOLDERJUMPERNC  [SJ_2S]  39.62,38.48 90 top
SJ21  [SJ_3_PASTE1&2&3]  68.07,38.48 270 top
SJ22  SOLDERJUMPERNC  [SJ_2S]  55.37,38.48 90 top
SJ23  [SJ_3_PASTE1&2&3]  83.82,38.48 270 top
SJ24  SOLDERJUMPERNC  [SJ_2S]  71.12,38.48 90 top
SJ25  [SJ_3_PASTE1&2&3]  99.57,38.48 270 top
SJ26  SOLDERJUMPERNC  [SJ_2S]  86.87,38.48 90 top
SJ27  [SJ_3_PASTE1&2&3]  115.32,38.48 270 top
SJ28  SOLDERJUMPERNC  [SJ_2S]  102.62,38.48 90 top
SJ29  [SJ_3_PASTE1&2&3]  20.83,59.31 270 top
SJ30  SOLDERJUMPERNC  [SJ_2S]  8.13,59.31 90 top
SJ31  [SJ_3_PASTE1&2&3]  36.58,59.31 270 top
SJ32  SOLDERJUMPERNC  [SJ_2S]  23.88,59.31 90 top
SJ33  [SJ_3_PASTE1&2&3]  52.32,59.31 270 top
SJ34  SOLDERJUMPERNC  [SJ_2S]  39.62,59.31 90 top
SJ35  [SJ_3_PASTE1&2&3]  68.07,59.31 270 top
SJ36  SOLDERJUMPERNC  [SJ_2S]  55.37,59.31 90 top
SJ37  [SJ_3_PASTE1&2&3]  83.82,59.31 270 top
SJ38  SOLDERJUMPERNC  [SJ_2S]  71.12,59.31 90 top
SJ39  [SJ_3_PASTE1&2&3]  99.57,59.31 270 top
SJ40  SOLDERJUMPERNC  [SJ_2S]  86.87,59.31 90 top
SJ41  [SJ_3_PASTE1&2&3]  115.32,59.31 270 top
SJ42  SOLDERJUMPERNC  [SJ_2S]  102.62,59.31 90 top
SJ43  [SJ_3_PASTE1&2&3]  20.83,80.14 270 top
SJ44  SOLDERJUMPERNC  [SJ_2S]  8.13,80.14 90 top
SJ45  [SJ_3_PASTE1&2&3]  36.58,80.14 270 top
SJ46  SOLDERJUMPERNC  [SJ_2S]  23.88,80.14 90 top
SJ47  [SJ_3_PASTE1&2&3]  52.32,80.14 270 top
SJ48  SOLDERJUMPERNC  [SJ_2S]  39.62,80.14 90 top
SJ49  [SJ_3_PASTE1&2&3]  68.07,80.14 270 top
SJ50  SOLDERJUMPERNC  [SJ_2S]  55.37,80.14 90 top
SJ51  [SJ_3_PASTE1&2&3]  83.82,80.14 270 top
SJ52  SOLDERJUMPERNC  [SJ_2S]  71.12,80.14 90 top
SJ53  [SJ_3_PASTE1&2&3]  99.57,80.14 270 top
SJ54  SOLDERJUMPERNC  [SJ_2S]  86.87,80.14 90 top
SJ55  [SJ_3_PASTE1&2&3]  115.32,80.14 270 top
SJ56  SOLDERJUMPERNC  [SJ_2S]  102.62,80.14 90 top
SJ57  [SJ_3_PASTE1&2&3]  20.83,100.97 270 top
SJ58  SOLDERJUMPERNC  [SJ_2S]  8.13,100.97 90 top
SJ59  [SJ_3_PASTE1&2&3]  36.58,100.97 270 top
SJ60  SOLDERJUMPERNC  [SJ_2S]  23.88,100.97 90 top
SJ61  [SJ_3_PASTE1&2&3]  52.32,100.97 270 top
SJ62  SOLDERJUMPERNC  [SJ_2S]  39.62,100.97 90 top
SJ63  [SJ_3_PASTE1&2&3]  68.07,100.97 270 top
SJ64  SOLDERJUMPERNC  [SJ_2S]  55.37,100.97 90 top
SJ65  [SJ_3_PASTE1&2&3]  83.82,100.97 270 top
SJ66  SOLDERJUMPERNC  [SJ_2S]  71.12,100.97 90 top
SJ67  [SJ_3_PASTE1&2&3]  99.57,100.97 270 top
SJ68  SOLDERJUMPERNC  [SJ_2S]  86.87,100.97 90 top
SJ69  [SJ_3_PASTE1&2&3]  115.32,100.97 270 top
SJ70  SOLDERJUMPERNC  [SJ_2S]  102.62,100.97 90 top
STANDOFF1  STAND-OFF  [STAND-OFF]  9.4,24.64 0 top
STANDOFF2  STAND-OFF  [STAND-OFF]  19.56,24.64 0 top
STANDOFF3  STAND-OFF  [STAND-OFF]  25.15,24.64 0 top
STANDOFF4  STAND-OFF  [STAND-OFF]  35.31,24.64 0 top
STANDOFF5  STAND-OFF  [STAND-OFF]  40.89,24.64 0 top
STANDOFF6  STAND-OFF  [STAND-OFF]  51.05,24.64 0 top
STANDOFF7  STAND-OFF  [STAND-OFF]  56.64,24.64 0 top
STANDOFF8  STAND-OFF  [STAND-OFF]  66.8,24.64 0 top
STANDOFF9  STAND-OFF  [STAND-OFF]  72.39,24.64 0 top
STANDOFF10  STAND-OFF  [STAND-OFF]  82.55,24.64 0 top
STANDOFF11  STAND-OFF  [STAND-OFF]  88.14,24.64 0 top
STANDOFF12  STAND-OFF  [STAND-OFF]  98.3,24.64 0 top
STANDOFF13  STAND-OFF  [STAND-OFF]  103.89,24.64 0 top
STANDOFF14  STAND-OFF  [STAND-OFF]  114.05,24.64 0 top
STANDOFF15  STAND-OFF  [STAND-OFF]  9.4,45.47 0 top
STANDOFF16  STAND-OFF  [STAND-OFF]  19.56,45.47 0 top
STANDOFF17  STAND-OFF  [STAND-OFF]  25.15,45.47 0 top
STANDOFF18  STAND-OFF  [STAND-OFF]  35.31,45.47 0 top
STANDOFF19  STAND-OFF  [STAND-OFF]  40.89,45.47 0 top
STANDOFF20  STAND-OFF  [STAND-OFF]  51.05,45.47 0 top
STANDOFF21  STAND-OFF  [STAND-OFF]  56.64,45.47 0 top
STANDOFF22  STAND-OFF  [STAND-OFF]  66.8,45.47 0 top
STANDOFF23  STAND-OFF  [STAND-OFF]  72.39,45.47 0 top
STANDOFF24  STAND-OFF  [STAND-OFF]  82.55,45.47 0 top
STANDOFF25  STAND-OFF  [STAND-OFF]  88.14,45.47 0 top
STANDOFF26  STAND-OFF  [STAND-OFF]  98.3,45.47 0 top
STANDOFF27  STAND-OFF  [STAND-OFF]  103.89,45.47 0 top
STANDOFF28  STAND-OFF  [STAND-OFF]  114.05,45.47 0 top
STANDOFF29  STAND-OFF  [STAND-OFF]  9.4,66.29 0 top
STANDOFF30  STAND-OFF  [STAND-OFF]  19.56,66.29 0 top
STANDOFF31  STAND-OFF  [STAND-OFF]  25.15,66.29 0 top
STANDOFF32  STAND-OFF  [STAND-OFF]  35.31,66.29 0 top
STANDOFF33  STAND-OFF  [STAND-OFF]  40.89,66.29 0 top
STANDOFF34  STAND-OFF  [STAND-OFF]  51.05,66.29 0 top
STANDOFF35  STAND-OFF  [STAND-OFF]  56.64,66.29 0 top
STANDOFF36  STAND-OFF  [STAND-OFF]  66.8,66.29 0 top
STANDOFF37  STAND-OFF  [STAND-OFF]  72.39,66.29 0 top
STANDOFF38  STAND-OFF  [STAND-OFF]  82.55,66.29 0 top
STANDOFF39  STAND-OFF  [STAND-OFF]  88.14,66.29 0 top
STANDOFF40  STAND-OFF  [STAND-OFF]  98.3,66.29 0 top
STANDOFF41  STAND-OFF  [STAND-OFF]  103.89,66.29 0 top
STANDOFF42  STAND-OFF  [STAND-OFF]  114.05,66.29 0 top
STANDOFF43  STAND-OFF  [STAND-OFF]  9.4,87.12 0 top
STANDOFF44  STAND-OFF  [STAND-OFF]  19.56,87.12 0 top
STANDOFF45  STAND-OFF  [STAND-OFF]  25.15,87.12 0 top
STANDOFF46  STAND-OFF  [STAND-OFF]  35.31,87.12 0 top
STANDOFF47  STAND-OFF  [STAND-OFF]  40.89,87.12 0 top
STANDOFF48  STAND-OFF  [STAND-OFF]  51.05,87.12 0 top
STANDOFF49  STAND-OFF  [STAND-OFF]  56.64,87.12 0 top
STANDOFF50  STAND-OFF  [STAND-OFF]  66.8,87.12 0 top
STANDOFF51  STAND-OFF  [STAND-OFF]  72.39,87.12 0 top
STANDOFF52  STAND-OFF  [STAND-OFF]  82.55,87.12 0 top
STANDOFF53  STAND-OFF  [STAND-OFF]  88.14,87.12 0 top
STANDOFF54  STAND-OFF  [STAND-OFF]  98.3,87.12 0 top
STANDOFF55  STAND-OFF  [STAND-OFF]  103.89,87.12 0 top
STANDOFF56  STAND-OFF  [STAND-OFF]  114.05,87.12 0 top
STANDOFF57  STAND-OFF  [STAND-OFF]  9.4,107.95 0 top
STANDOFF58  STAND-OFF  [STAND-OFF]  19.56,107.95 0 top
STANDOFF59  STAND-OFF  [STAND-OFF]  25.15,107.95 0 top
STANDOFF60  STAND-OFF  [STAND-OFF]  35.31,107.95 0 top
STANDOFF61  STAND-OFF  [STAND-OFF]  40.89,107.95 0 top
STANDOFF62  STAND-OFF  [STAND-OFF]  51.05,107.95 0 top
STANDOFF63  STAND-OFF  [STAND-OFF]  56.64,107.95 0 top
STANDOFF64  STAND-OFF  [STAND-OFF]  66.8,107.95 0 top
STANDOFF65  STAND-OFF  [STAND-OFF]  72.39,107.95 0 top
STANDOFF66  STAND-OFF  [STAND-OFF]  82.55,107.95 0 top
STANDOFF67  STAND-OFF  [STAND-OFF]  88.14,107.95 0 top
STANDOFF68  STAND-OFF  [STAND-OFF]  98.3,107.95 0 top
STANDOFF69  STAND-OFF  [STAND-OFF]  103.89,107.95 0 top
STANDOFF70  STAND-OFF  [STAND-OFF]  114.05,107.95 0 top
U1  APDS-9960  [APDS-9960]  14.48,22.1 0 top
U2  APDS-9960  [APDS-9960]  30.23,22.1 0 top
U3  APDS-9960  [APDS-9960]  45.97,22.1 0 top
U4  APDS-9960  [APDS-9960]  61.72,22.1 0 top
U5  APDS-9960  [APDS-9960]  77.47,22.1 0 top
U6  APDS-9960  [APDS-9960]  93.22,22.1 0 top
U7  APDS-9960  [APDS-9960]  108.97,22.1 0 top
U8  APDS-9960  [APDS-9960]  14.48,42.93 0 top
U9  APDS-9960  [APDS-9960]  30.23,42.93 0 top
U10  APDS-9960  [APDS-9960]  45.97,42.93 0 top
U11  APDS-9960  [APDS-9960]  61.72,42.93 0 top
U12  APDS-9960  [APDS-9960]  77.47,42.93 0 top
U13  APDS-9960  [APDS-9960]  93.22,42.93 0 top
U14  APDS-9960  [APDS-9960]  108.97,42.93 0 top
U15  APDS-9960  [APDS-9960]  14.48,63.75 0 top
U16  APDS-9960  [APDS-9960]  30.23,63.75 0 top
U17  APDS-9960  [APDS-9960]  45.97,63.75 0 top
U18  APDS-9960  [APDS-9960]  61.72,63.75 0 top
U19  APDS-9960  [APDS-9960]  77.47,63.75 0 top
U20  APDS-9960  [APDS-9960]  93.22,63.75 0 top
U21  APDS-9960  [APDS-9960]  108.97,63.75 0 top
U22  APDS-9960  [APDS-9960]  14.48,84.58 0 top
U23  APDS-9960  [APDS-9960]  30.23,84.58 0 top
U24  APDS-9960  [APDS-9960]  45.97,84.58 0 top
U25  APDS-9960  [APDS-9960]  61.72,84.58 0 top
U26  APDS-9960  [APDS-9960]  77.47,84.58 0 top
U27  APDS-9960  [APDS-9960]  93.22,84.58 0 top
U28  APDS-9960  [APDS-9960]  108.97,84.58 0 top
U29  APDS-9960  [APDS-9960]  14.48,105.41 0 top
U30  APDS-9960  [APDS-9960]  30.23,105.41 0 top
U31  APDS-9960  [APDS-9960]  45.97,105.41 0 top
U32  APDS-9960  [APDS-9960]  61.72,105.41 0 top
U33  APDS-9960  [APDS-9960]  77.47,105.41 0 top
U34  APDS-9960  [APDS-9960]  93.22,105.41 0 top
U35  APDS-9960  [APDS-9960]  108.97,105.41 0 top
U$1  SFE_LOGO_NAME_FLAME.1_INCH  [SFE_LOGO_NAME_FLAME_.1]  20.45,11.18 0 bottom
U$2  SFE_LOGO_NAME_FLAME.1_INCH  [SFE_LOGO_NAME_FLAME_.1]  36.2,11.18 0 bottom
U$3  SFE_LOGO_NAME_FLAME.1_INCH  [SFE_LOGO_NAME_FLAME_.1]  51.94,11.18 0 bottom
U$4  SFE_LOGO_NAME_FLAME.1_INCH  [SFE_LOGO_NAME_FLAME_.1]  67.69,11.18 0 bottom
U$5  SFE_LOGO_NAME_FLAME.1_INCH  [SFE_LOGO_NAME_FLAME_.1]  83.44,11.18 0 bottom
U$6  SFE_LOGO_NAME_FLAME.1_INCH  [SFE_LOGO_NAME_FLAME_.1]  99.19,11.18 0 bottom
U$7  SFE_LOGO_NAME_FLAME.1_INCH  [SFE_LOGO_NAME_FLAME_.1]  114.94,11.18 0 bottom
U$8  SFE_LOGO_NAME_FLAME.1_INCH  [SFE_LOGO_NAME_FLAME_.1]  20.45,32 0 bottom
U$9  SFE_LOGO_NAME_FLAME.1_INCH  [SFE_LOGO_NAME_FLAME_.1]  36.2,32 0 bottom
U$10  SFE_LOGO_NAME_FLAME.1_INCH  [SFE_LOGO_NAME_FLAME_.1]  51.94,32 0 bottom
U$11  SFE_LOGO_NAME_FLAME.1_INCH  [SFE_LOGO_NAME_FLAME_.1]  67.69,32 0 bottom
U$12  SFE_LOGO_NAME_FLAME.1_INCH  [SFE_LOGO_NAME_FLAME_.1]  83.44,32 0 bottom
U$13  SFE_LOGO_NAME_FLAME.1_INCH  [SFE_LOGO_NAME_FLAME_.1]  99.19,32 0 bottom
U$14  SFE_LOGO_NAME_FLAME.1_INCH  [SFE_LOGO_NAME_FLAME_.1]  114.94,32 0 bottom
U$15  SFE_LOGO_NAME_FLAME.1_INCH  [SFE_LOGO_NAME_FLAME_.1]  20.45,52.83 0 bottom
U$16  SFE_LOGO_NAME_FLAME.1_INCH  [SFE_LOGO_NAME_FLAME_.1]  36.2,52.83 0 bottom
U$17  SFE_LOGO_NAME_FLAME.1_INCH  [SFE_LOGO_NAME_FLAME_.1]  51.94,52.83 0 bottom
U$18  SFE_LOGO_NAME_FLAME.1_INCH  [SFE_LOGO_NAME_FLAME_.1]  67.69,52.83 0 bottom
U$19  SFE_LOGO_NAME_FLAME.1_INCH  [SFE_LOGO_NAME_FLAME_.1]  83.44,52.83 0 bottom
U$20  SFE_LOGO_NAME_FLAME.1_INCH  [SFE_LOGO_NAME_FLAME_.1]  99.19,52.83 0 bottom
U$21  SFE_LOGO_NAME_FLAME.1_INCH  [SFE_LOGO_NAME_FLAME_.1]  114.94,52.83 0 bottom
U$22  SFE_LOGO_NAME_FLAME.1_INCH  [SFE_LOGO_NAME_FLAME_.1]  20.45,73.66 0 bottom
U$23  SFE_LOGO_NAME_FLAME.1_INCH  [SFE_LOGO_NAME_FLAME_.1]  36.2,73.66 0 bottom
U$24  SFE_LOGO_NAME_FLAME.1_INCH  [SFE_LOGO_NAME_FLAME_.1]  51.94,73.66 0 bottom
U$25  SFE_LOGO_NAME_FLAME.1_INCH  [SFE_LOGO_NAME_FLAME_.1]  67.69,73.66 0 bottom
U$26  SFE_LOGO_NAME_FLAME.1_INCH  [SFE_LOGO_NAME_FLAME_.1]  83.44,73.66 0 bottom
U$27  SFE_LOGO_NAME_FLAME.1_INCH  [SFE_LOGO_NAME_FLAME_.1]  99.19,73.66 0 bottom
U$28  SFE_LOGO_NAME_FLAME.1_INCH  [SFE_LOGO_NAME_FLAME_.1]  114.94,73.66 0 bottom
U$29  SFE_LOGO_NAME_FLAME.1_INCH  [SFE_LOGO_NAME_FLAME_.1]  20.45,94.49 0 bottom
U$30  SFE_LOGO_NAME_FLAME.1_INCH  [SFE_LOGO_NAME_FLAME_.1]  36.2,94.49 0 bottom
U$31  SFE_LOGO_NAME_FLAME.1_INCH  [SFE_LOGO_NAME_FLAME_.1]  51.94,94.49 0 bottom
U$32  SFE_LOGO_NAME_FLAME.1_INCH  [SFE_LOGO_NAME_FLAME_.1]  67.69,94.49 0 bottom
U$33  SFE_LOGO_NAME_FLAME.1_INCH  [SFE_LOGO_NAME_FLAME_.1]  83.44,94.49 0 bottom
U$34  SFE_LOGO_NAME_FLAME.1_INCH  [SFE_LOGO_NAME_FLAME_.1]  99.19,94.49 0 bottom
U$35  SFE_LOGO_NAME_FLAME.1_INCH  [SFE_LOGO_NAME_FLAME_.1]  114.94,94.49 0 bottom

## Library data of the parts
C1 C6 C9 C12 C15 C18 C21 C24 C27 C30 C33 C36 C39 C42 C45 C48 C51 C54 C57 C60 C63 C66 C69 C72 C75 C78 C81 C84 C87 C90 C93 C96 C99 C102 C105 = SparkFun-Capacitors; PROD_ID: CAP-07890
C2-C5 C7 C8 C10 C11 C13 C14 C16 C17 C19 C20 C22 C23 C25 C26 C28 C29 C31 C32 C34 C35 C37 C38 C40 C41 C43 C44 C46 C47 C49 C50 C52 C53 C55 C56 C58 C59 C61 C62 C64 C65 C67 C68 C70 C71 C73 C74 C76 C77 C79 C80 C82 C83 C85 C86 C88 C89 C91 C92 C94 C95 C97 C98 C100 C101 C103 C104 = SparkFun-Capacitors; PROD_ID: CAP-00868
E$1 SJ2 SJ4 SJ6 SJ8 SJ10 SJ12 SJ14 SJ16 SJ18 SJ20 SJ22 SJ24 SJ26 SJ28 SJ30 SJ32 SJ34 SJ36 SJ38 SJ40 SJ42 SJ44 SJ46 SJ48 SJ50 SJ52 SJ54 SJ56 SJ58 SJ60 SJ62 SJ64 SJ66 SJ68 SJ70 = SparkFun-Retired
E$4 E$6 FID1-FID70 LOGO1-LOGO70 U$1-U$35 = SparkFun-Aesthetics
JP1-JP35 = SparkFun-Connectors
R1 R5 R9 R13 R17 R21 R25 R29 R33 R37 R41 R45 R49 R53 R57 R61 R65 R69 R73 R77 R81 R85 R89 R93 R97 R101 R105 R109 R113 R117 R121 R125 R129 R133 R137 = SparkFun-Resistors; PROD_ID: RES-00824
R2 R3 R6 R8 R10 R12 R14 R16 R18 R20 R22 R24 R26 R28 R30 R32 R34 R36 R38 R40 R42 R44 R46 R48 R50 R52 R54 R56 R58 R60 R62 R64 R66 R68 R70 R72 R74 R76 R78 R80 R82 R84 R86 R88 R90 R92 R94 R96 R98 R100 R102 R104 R106 R108 R110 R112 R114 R116 R118 R120 R122 R124 R126 R128 R130 R132 R134 R136 R138 R140 = SparkFun-Resistors; PROD_ID: RES-07857
R4 R7 R11 R15 R19 R23 R27 R31 R35 R39 R43 R47 R51 R55 R59 R63 R67 R71 R75 R79 R83 R87 R91 R95 R99 R103 R107 R111 R115 R119 R123 R127 R131 R135 R139 = SparkFun-Resistors
SJ1 SJ3 SJ5 SJ7 SJ9 SJ11 SJ13 SJ15 SJ17 SJ19 SJ21 SJ23 SJ25 SJ27 SJ29 SJ31 SJ33 SJ35 SJ37 SJ39 SJ41 SJ43 SJ45 SJ47 SJ49 SJ51 SJ53 SJ55 SJ57 SJ59 SJ61 SJ63 SJ65 SJ67 SJ69 = SparkFun-Passives
STANDOFF1-STANDOFF70 = SparkFun-Electromechanical
U1-U35 = SparkFun-Sensors; PROD_ID: SEN-12005

## Nets
GND: C1.C C2.2 C3.2 JP1.2 U1.6
GND1: C4.2 C5.2 C6.C JP2.2 U2.6
GND2: C7.2 C8.2 C9.C JP3.2 U3.6
GND3: C10.2 C11.2 C12.C JP4.2 U4.6
GND4: C13.2 C14.2 C15.C JP5.2 U5.6
GND5: C16.2 C17.2 C18.C JP6.2 U6.6
GND6: C19.2 C20.2 C21.C JP7.2 U7.6
GND7: C22.2 C23.2 C24.C JP8.2 U8.6
GND8: C25.2 C26.2 C27.C JP9.2 U9.6
GND9: C28.2 C29.2 C30.C JP10.2 U10.6
GND10: C31.2 C32.2 C33.C JP11.2 U11.6
GND11: C34.2 C35.2 C36.C JP12.2 U12.6
GND12: C37.2 C38.2 C39.C JP13.2 U13.6
GND13: C40.2 C41.2 C42.C JP14.2 U14.6
GND14: C43.2 C44.2 C45.C JP15.2 U15.6
GND15: C46.2 C47.2 C48.C JP16.2 U16.6
GND16: C49.2 C50.2 C51.C JP17.2 U17.6
GND17: C52.2 C53.2 C54.C JP18.2 U18.6
GND18: C55.2 C56.2 C57.C JP19.2 U19.6
GND19: C58.2 C59.2 C60.C JP20.2 U20.6
GND20: C61.2 C62.2 C63.C JP21.2 U21.6
GND21: C64.2 C65.2 C66.C JP22.2 U22.6
GND22: C67.2 C68.2 C69.C JP23.2 U23.6
GND23: C70.2 C71.2 C72.C JP24.2 U24.6
GND24: C73.2 C74.2 C75.C JP25.2 U25.6
GND25: C76.2 C77.2 C78.C JP26.2 U26.6
GND26: C79.2 C80.2 C81.C JP27.2 U27.6
GND27: C82.2 C83.2 C84.C JP28.2 U28.6
GND28: C85.2 C86.2 C87.C JP29.2 U29.6
GND29: C88.2 C89.2 C90.C JP30.2 U30.6
GND30: C91.2 C92.2 C93.C JP31.2 U31.6
GND31: C94.2 C95.2 C96.C JP32.2 U32.6
GND32: C97.2 C98.2 C99.C JP33.2 U33.6
GND33: C100.2 C101.2 C102.C JP34.2 U34.6
GND34: C103.2 C104.2 C105.C JP35.2 U35.6
INT: JP1.6 R1.1 U1.2
INT1: JP2.6 R5.1 U2.2
INT2: JP3.6 R9.1 U3.2
INT3: JP4.6 R13.1 U4.2
INT4: JP5.6 R17.1 U5.2
INT5: JP6.6 R21.1 U6.2
INT6: JP7.6 R25.1 U7.2
INT7: JP8.6 R29.1 U8.2
INT8: JP9.6 R33.1 U9.2
INT9: JP10.6 R37.1 U10.2
INT10: JP11.6 R41.1 U11.2
INT11: JP12.6 R45.1 U12.2
INT12: JP13.6 R49.1 U13.2
INT13: JP14.6 R53.1 U14.2
INT14: JP15.6 R57.1 U15.2
INT15: JP16.6 R61.1 U16.2
INT16: JP17.6 R65.1 U17.2
INT17: JP18.6 R69.1 U18.2
INT18: JP19.6 R73.1 U19.2
INT19: JP20.6 R77.1 U20.2
INT20: JP21.6 R81.1 U21.2
INT21: JP22.6 R85.1 U22.2
INT22: JP23.6 R89.1 U23.2
INT23: JP24.6 R93.1 U24.2
INT24: JP25.6 R97.1 U25.2
INT25: JP26.6 R101.1 U26.2
INT26: JP27.6 R105.1 U27.2
INT27: JP28.6 R109.1 U28.2
INT28: JP29.6 R113.1 U29.2
INT29: JP30.6 R117.1 U30.2
INT30: JP31.6 R121.1 U31.2
INT31: JP32.6 R125.1 U32.2
INT32: JP33.6 R129.1 U33.2
INT33: JP34.6 R133.1 U34.2
INT34: JP35.6 R137.1 U35.2
N$1: R2.2 SJ1.3
N$2: R3.2 SJ1.1
N$4: U1.3 U1.4
N$5: R6.2 SJ3.3
N$6: R8.2 SJ3.1
N$7: U2.3 U2.4
N$8: R10.2 SJ5.3
N$9: R12.2 SJ5.1
N$10: U3.3 U3.4
N$11: R14.2 SJ7.3
N$12: R16.2 SJ7.1
N$13: U4.3 U4.4
N$14: R18.2 SJ9.3
N$15: R20.2 SJ9.1
N$16: U5.3 U5.4
N$17: R22.2 SJ11.3
N$18: R24.2 SJ11.1
N$19: U6.3 U6.4
N$20: R26.2 SJ13.3
N$21: R28.2 SJ13.1
N$22: U7.3 U7.4
N$23: R30.2 SJ15.3
N$24: R32.2 SJ15.1
N$25: U8.3 U8.4
N$26: R34.2 SJ17.3
N$27: R36.2 SJ17.1
N$28: U9.3 U9.4
N$29: R38.2 SJ19.3
N$30: R40.2 SJ19.1
N$31: U10.3 U10.4
N$32: R42.2 SJ21.3
N$33: R44.2 SJ21.1
N$34: U11.3 U11.4
N$35: R46.2 SJ23.3
N$36: R48.2 SJ23.1
N$37: U12.3 U12.4
N$38: R50.2 SJ25.3
N$39: R52.2 SJ25.1
N$40: U13.3 U13.4
N$41: R54.2 SJ27.3
N$42: R56.2 SJ27.1
N$43: U14.3 U14.4
N$44: R58.2 SJ29.3
N$45: R60.2 SJ29.1
N$46: U15.3 U15.4
N$47: R62.2 SJ31.3
N$48: R64.2 SJ31.1
N$49: U16.3 U16.4
N$50: R66.2 SJ33.3
N$51: R68.2 SJ33.1
N$52: U17.3 U17.4
N$53: R70.2 SJ35.3
N$54: R72.2 SJ35.1
N$55: U18.3 U18.4
N$56: R74.2 SJ37.3
N$57: R76.2 SJ37.1
N$58: U19.3 U19.4
N$59: R78.2 SJ39.3
N$60: R80.2 SJ39.1
N$61: U20.3 U20.4
N$62: R82.2 SJ41.3
N$63: R84.2 SJ41.1
N$64: U21.3 U21.4
N$65: R86.2 SJ43.3
N$66: R88.2 SJ43.1
N$67: U22.3 U22.4
N$68: R90.2 SJ45.3
N$69: R92.2 SJ45.1
N$70: U23.3 U23.4
N$71: R94.2 SJ47.3
N$72: R96.2 SJ47.1
N$73: U24.3 U24.4
N$74: R98.2 SJ49.3
N$75: R100.2 SJ49.1
N$76: U25.3 U25.4
N$77: R102.2 SJ51.3
N$78: R104.2 SJ51.1
N$79: U26.3 U26.4
N$80: R106.2 SJ53.3
N$81: R108.2 SJ53.1
N$82: U27.3 U27.4
N$83: R110.2 SJ55.3
N$84: R112.2 SJ55.1
N$85: U28.3 U28.4
N$86: R114.2 SJ57.3
N$87: R116.2 SJ57.1
N$88: U29.3 U29.4
N$89: R118.2 SJ59.3
N$90: R120.2 SJ59.1
N$91: U30.3 U30.4
N$92: R122.2 SJ61.3
N$93: R124.2 SJ61.1
N$94: U31.3 U31.4
N$95: R126.2 SJ63.3
N$96: R128.2 SJ63.1
N$97: U32.3 U32.4
N$98: R130.2 SJ65.3
N$99: R132.2 SJ65.1
N$100: U33.3 U33.4
N$101: R134.2 SJ67.3
N$102: R136.2 SJ67.1
N$103: U34.3 U34.4
N$104: R138.2 SJ69.3
N$105: R140.2 SJ69.1
N$106: U35.3 U35.4
SCL: JP1.5 R3.1 U1.7
SCL1: JP2.5 R8.1 U2.7
SCL2: JP3.5 R12.1 U3.7
SCL3: JP4.5 R16.1 U4.7
SCL4: JP5.5 R20.1 U5.7
SCL5: JP6.5 R24.1 U6.7
SCL6: JP7.5 R28.1 U7.7
SCL7: JP8.5 R32.1 U8.7
SCL8: JP9.5 R36.1 U9.7
SCL9: JP10.5 R40.1 U10.7
SCL10: JP11.5 R44.1 U11.7
SCL11: JP12.5 R48.1 U12.7
SCL12: JP13.5 R52.1 U13.7
SCL13: JP14.5 R56.1 U14.7
SCL14: JP15.5 R60.1 U15.7
SCL15: JP16.5 R64.1 U16.7
SCL16: JP17.5 R68.1 U17.7
SCL17: JP18.5 R72.1 U18.7
SCL18: JP19.5 R76.1 U19.7
SCL19: JP20.5 R80.1 U20.7
SCL20: JP21.5 R84.1 U21.7
SCL21: JP22.5 R88.1 U22.7
SCL22: JP23.5 R92.1 U23.7
SCL23: JP24.5 R96.1 U24.7
SCL24: JP25.5 R100.1 U25.7
SCL25: JP26.5 R104.1 U26.7
SCL26: JP27.5 R108.1 U27.7
SCL27: JP28.5 R112.1 U28.7
SCL28: JP29.5 R116.1 U29.7
SCL29: JP30.5 R120.1 U30.7
SCL30: JP31.5 R124.1 U31.7
SCL31: JP32.5 R128.1 U32.7
SCL32: JP33.5 R132.1 U33.7
SCL33: JP34.5 R136.1 U34.7
SCL34: JP35.5 R140.1 U35.7
SDA: JP1.4 R2.1 U1.1
SDA1: JP2.4 R6.1 U2.1
SDA2: JP3.4 R10.1 U3.1
SDA3: JP4.4 R14.1 U4.1
SDA4: JP5.4 R18.1 U5.1
SDA5: JP6.4 R22.1 U6.1
SDA6: JP7.4 R26.1 U7.1
SDA7: JP8.4 R30.1 U8.1
SDA8: JP9.4 R34.1 U9.1
SDA9: JP10.4 R38.1 U10.1
SDA10: JP11.4 R42.1 U11.1
SDA11: JP12.4 R46.1 U12.1
SDA12: JP13.4 R50.1 U13.1
SDA13: JP14.4 R54.1 U14.1
SDA14: JP15.4 R58.1 U15.1
SDA15: JP16.4 R62.1 U16.1
SDA16: JP17.4 R66.1 U17.1
SDA17: JP18.4 R70.1 U18.1
SDA18: JP19.4 R74.1 U19.1
SDA19: JP20.4 R78.1 U20.1
SDA20: JP21.4 R82.1 U21.1
SDA21: JP22.4 R86.1 U22.1
SDA22: JP23.4 R90.1 U23.1
SDA23: JP24.4 R94.1 U24.1
SDA24: JP25.4 R98.1 U25.1
SDA25: JP26.4 R102.1 U26.1
SDA26: JP27.4 R106.1 U27.1
SDA27: JP28.4 R110.1 U28.1
SDA28: JP29.4 R114.1 U29.1
SDA29: JP30.4 R118.1 U30.1
SDA30: JP31.4 R122.1 U31.1
SDA31: JP32.4 R126.1 U32.1
SDA32: JP33.4 R130.1 U33.1
SDA33: JP34.4 R134.1 U34.1
SDA34: JP35.4 R138.1 U35.1
VCC: C3.1 JP1.3 R1.2 R4.2 SJ1.2 SJ2.2 U1.8
VCC1: C5.1 JP2.3 R5.2 R7.2 SJ3.2 SJ4.2 U2.8
VCC2: C8.1 JP3.3 R9.2 R11.2 SJ5.2 SJ6.2 U3.8
VCC3: C11.1 JP4.3 R13.2 R15.2 SJ7.2 SJ8.2 U4.8
VCC4: C14.1 JP5.3 R17.2 R19.2 SJ9.2 SJ10.2 U5.8
VCC5: C17.1 JP6.3 R21.2 R23.2 SJ11.2 SJ12.2 U6.8
VCC6: C20.1 JP7.3 R25.2 R27.2 SJ13.2 SJ14.2 U7.8
VCC7: C23.1 JP8.3 R29.2 R31.2 SJ15.2 SJ16.2 U8.8
VCC8: C26.1 JP9.3 R33.2 R35.2 SJ17.2 SJ18.2 U9.8
VCC9: C29.1 JP10.3 R37.2 R39.2 SJ19.2 SJ20.2 U10.8
VCC10: C32.1 JP11.3 R41.2 R43.2 SJ21.2 SJ22.2 U11.8
VCC11: C35.1 JP12.3 R45.2 R47.2 SJ23.2 SJ24.2 U12.8
VCC12: C38.1 JP13.3 R49.2 R51.2 SJ25.2 SJ26.2 U13.8
VCC13: C41.1 JP14.3 R53.2 R55.2 SJ27.2 SJ28.2 U14.8
VCC14: C44.1 JP15.3 R57.2 R59.2 SJ29.2 SJ30.2 U15.8
VCC15: C47.1 JP16.3 R61.2 R63.2 SJ31.2 SJ32.2 U16.8
VCC16: C50.1 JP17.3 R65.2 R67.2 SJ33.2 SJ34.2 U17.8
VCC17: C53.1 JP18.3 R69.2 R71.2 SJ35.2 SJ36.2 U18.8
VCC18: C56.1 JP19.3 R73.2 R75.2 SJ37.2 SJ38.2 U19.8
VCC19: C59.1 JP20.3 R77.2 R79.2 SJ39.2 SJ40.2 U20.8
VCC20: C62.1 JP21.3 R81.2 R83.2 SJ41.2 SJ42.2 U21.8
VCC21: C65.1 JP22.3 R85.2 R87.2 SJ43.2 SJ44.2 U22.8
VCC22: C68.1 JP23.3 R89.2 R91.2 SJ45.2 SJ46.2 U23.8
VCC23: C71.1 JP24.3 R93.2 R95.2 SJ47.2 SJ48.2 U24.8
VCC24: C74.1 JP25.3 R97.2 R99.2 SJ49.2 SJ50.2 U25.8
VCC25: C77.1 JP26.3 R101.2 R103.2 SJ51.2 SJ52.2 U26.8
VCC26: C80.1 JP27.3 R105.2 R107.2 SJ53.2 SJ54.2 U27.8
VCC27: C83.1 JP28.3 R109.2 R111.2 SJ55.2 SJ56.2 U28.8
VCC28: C86.1 JP29.3 R113.2 R115.2 SJ57.2 SJ58.2 U29.8
VCC29: C89.1 JP30.3 R117.2 R119.2 SJ59.2 SJ60.2 U30.8
VCC30: C92.1 JP31.3 R121.2 R123.2 SJ61.2 SJ62.2 U31.8
VCC31: C95.1 JP32.3 R125.2 R127.2 SJ63.2 SJ64.2 U32.8
VCC32: C98.1 JP33.3 R129.2 R131.2 SJ65.2 SJ66.2 U33.8
VCC33: C101.1 JP34.3 R133.2 R135.2 SJ67.2 SJ68.2 U34.8
VCC34: C104.1 JP35.3 R137.2 R139.2 SJ69.2 SJ70.2 U35.8
VL: C1.A C2.1 JP1.1 R4.1 SJ2.1 U1.5
VL1: C4.1 C6.A JP2.1 R7.1 SJ4.1 U2.5
VL2: C7.1 C9.A JP3.1 R11.1 SJ6.1 U3.5
VL3: C10.1 C12.A JP4.1 R15.1 SJ8.1 U4.5
VL4: C13.1 C15.A JP5.1 R19.1 SJ10.1 U5.5
VL5: C16.1 C18.A JP6.1 R23.1 SJ12.1 U6.5
VL6: C19.1 C21.A JP7.1 R27.1 SJ14.1 U7.5
VL7: C22.1 C24.A JP8.1 R31.1 SJ16.1 U8.5
VL8: C25.1 C27.A JP9.1 R35.1 SJ18.1 U9.5
VL9: C28.1 C30.A JP10.1 R39.1 SJ20.1 U10.5
VL10: C31.1 C33.A JP11.1 R43.1 SJ22.1 U11.5
VL11: C34.1 C36.A JP12.1 R47.1 SJ24.1 U12.5
VL12: C37.1 C39.A JP13.1 R51.1 SJ26.1 U13.5
VL13: C40.1 C42.A JP14.1 R55.1 SJ28.1 U14.5
VL14: C43.1 C45.A JP15.1 R59.1 SJ30.1 U15.5
VL15: C46.1 C48.A JP16.1 R63.1 SJ32.1 U16.5
VL16: C49.1 C51.A JP17.1 R67.1 SJ34.1 U17.5
VL17: C52.1 C54.A JP18.1 R71.1 SJ36.1 U18.5
VL18: C55.1 C57.A JP19.1 R75.1 SJ38.1 U19.5
VL19: C58.1 C60.A JP20.1 R79.1 SJ40.1 U20.5
VL20: C61.1 C63.A JP21.1 R83.1 SJ42.1 U21.5
VL21: C64.1 C66.A JP22.1 R87.1 SJ44.1 U22.5
VL22: C67.1 C69.A JP23.1 R91.1 SJ46.1 U23.5
VL23: C70.1 C72.A JP24.1 R95.1 SJ48.1 U24.5
VL24: C73.1 C75.A JP25.1 R99.1 SJ50.1 U25.5
VL25: C76.1 C78.A JP26.1 R103.1 SJ52.1 U26.5
VL26: C79.1 C81.A JP27.1 R107.1 SJ54.1 U27.5
VL27: C82.1 C84.A JP28.1 R111.1 SJ56.1 U28.5
VL28: C85.1 C87.A JP29.1 R115.1 SJ58.1 U29.5
VL29: C88.1 C90.A JP30.1 R119.1 SJ60.1 U30.5
VL30: C91.1 C93.A JP31.1 R123.1 SJ62.1 U31.5
VL31: C94.1 C96.A JP32.1 R127.1 SJ64.1 U32.5
VL32: C97.1 C99.A JP33.1 R131.1 SJ66.1 U33.5
VL33: C100.1 C102.A JP34.1 R135.1 SJ68.1 U34.5
VL34: C103.1 C105.A JP35.1 R139.1 SJ70.1 U35.5

## Tracks (layer width: path | path; a pad name or v marks a point on that pad's centre or on a via)
GND  (via drill 0.38)
  Top 0.559: 13.77,21.61 13.26,21.61 13.26,21.59 12.93,21.26
  other vias: 12.65,21.21 11.63,21.46 14.43,16.13 14.48,9.27 19.56,9.27 21.08,15.62 17.02,9.27 9.4,9.27 11.94,9.27 9.14,15.37 16.51,26.29 21.08,21.46 7.75,21.72
  pour Top (isolate 0.305): 6.86,27.18 22.1,27.18 22.1,6.86 6.86,6.86
  pour Bottom (isolate 0.305): 6.86,27.18 22.1,27.18 22.1,6.86 6.86,6.86
GND1  (via drill 0.38)
  Top 0.559: 29.52,21.61 29.01,21.61 29.01,21.59 28.68,21.26
  other vias: 28.4,21.21 27.38,21.46 30.18,16.13 30.23,9.27 35.31,9.27 36.83,15.62 32.77,9.27 25.15,9.27 27.69,9.27 24.89,15.37 32.26,26.29 36.83,21.46 23.5,21.72
  pour Top (isolate 0.305): 22.61,27.18 37.85,27.18 37.85,6.86 22.61,6.86
  pour Bottom (isolate 0.305): 22.61,27.18 37.85,27.18 37.85,6.86 22.61,6.86
GND2  (via drill 0.38)
  Top 0.559: U3.6 44.76,21.61 44.76,21.59 44.42,21.26
  other vias: 44.15,21.21 43.13,21.46 45.92,16.13 45.97,9.27 51.05,9.27 52.58,15.62 48.51,9.27 40.89,9.27 43.43,9.27 40.64,15.37 48.01,26.29 52.58,21.46 39.24,21.72
  pour Top (isolate 0.305): 38.35,27.18 53.59,27.18 53.59,6.86 38.35,6.86
  pour Bottom (isolate 0.305): 38.35,27.18 53.59,27.18 53.59,6.86 38.35,6.86
GND3  (via drill 0.38)
  Top 0.559: U4.6 60.5,21.61 60.5,21.59 60.17,21.26
  other vias: 59.89,21.21 58.88,21.46 61.67,16.13 61.72,9.27 66.8,9.27 68.33,15.62 64.26,9.27 56.64,9.27 59.18,9.27 56.39,15.37 63.75,26.29 68.33,21.46 54.99,21.72
  pour Top (isolate 0.305): 54.1,27.18 69.34,27.18 69.34,6.86 54.1,6.86
  pour Bottom (isolate 0.305): 54.1,27.18 69.34,27.18 69.34,6.86 54.1,6.86
GND4  (via drill 0.38)
  Top 0.559: U5.6 76.25,21.61 76.25,21.59 75.92,21.26
  other vias: 75.64,21.21 74.63,21.46 77.42,16.13 77.47,9.27 82.55,9.27 84.07,15.62 80.01,9.27 72.39,9.27 74.93,9.27 72.14,15.37 79.5,26.29 84.07,21.46 70.74,21.72
  pour Top (isolate 0.305): 69.85,27.18 85.09,27.18 85.09,6.86 69.85,6.86
  pour Bottom (isolate 0.305): 69.85,27.18 85.09,27.18 85.09,6.86 69.85,6.86
GND5  (via drill 0.38)
  Top 0.559: 92.51,21.61 92,21.61 92,21.59 91.67,21.26
  other vias: 91.39,21.21 90.37,21.46 93.17,16.13 93.22,9.27 98.3,9.27 99.82,15.62 95.76,9.27 88.14,9.27 90.68,9.27 87.88,15.37 95.25,26.29 99.82,21.46 86.49,21.72
  pour Top (isolate 0.305): 85.6,27.18 100.84,27.18 100.84,6.86 85.6,6.86
  pour Bottom (isolate 0.305): 85.6,27.18 100.84,27.18 100.84,6.86 85.6,6.86
GND6  (via drill 0.38)
  Top 0.559: 108.25,21.61 107.75,21.61 107.75,21.59 107.42,21.26
  other vias: 107.14,21.21 106.12,21.46 108.92,16.13 108.97,9.27 114.05,9.27 115.57,15.62 111.51,9.27 103.89,9.27 106.43,9.27 103.63,15.37 111,26.29 115.57,21.46 102.23,21.72
  pour Top (isolate 0.305): 101.35,27.18 116.59,27.18 116.59,6.86 101.35,6.86
  pour Bottom (isolate 0.305): 101.35,27.18 116.59,27.18 116.59,6.86 101.35,6.86
GND7  (via drill 0.38)
  Top 0.559: 13.77,42.44 13.26,42.44 13.26,42.42 12.93,42.09
  other vias: 12.65,42.04 11.63,42.29 14.43,36.96 14.48,30.1 19.56,30.1 21.08,36.45 17.02,30.1 9.4,30.1 11.94,30.1 9.14,36.2 16.51,47.12 21.08,42.29 7.75,42.55
  pour Top (isolate 0.305): 6.86,48.01 22.1,48.01 22.1,27.69 6.86,27.69
  pour Bottom (isolate 0.305): 6.86,48.01 22.1,48.01 22.1,27.69 6.86,27.69
GND8  (via drill 0.38)
  Top 0.559: 29.52,42.44 29.01,42.44 29.01,42.42 28.68,42.09
  other vias: 28.4,42.04 27.38,42.29 30.18,36.96 30.23,30.1 35.31,30.1 36.83,36.45 32.77,30.1 25.15,30.1 27.69,30.1 24.89,36.2 32.26,47.12 36.83,42.29 23.5,42.55
  pour Top (isolate 0.305): 22.61,48.01 37.85,48.01 37.85,27.69 22.61,27.69
  pour Bottom (isolate 0.305): 22.61,48.01 37.85,48.01 37.85,27.69 22.61,27.69
GND9  (via drill 0.38)
  Top 0.559: U10.6 44.76,42.44 44.76,42.42 44.42,42.09
  other vias: 44.15,42.04 43.13,42.29 45.92,36.96 45.97,30.1 51.05,30.1 52.58,36.45 48.51,30.1 40.89,30.1 43.43,30.1 40.64,36.2 48.01,47.12 52.58,42.29 39.24,42.55
  pour Top (isolate 0.305): 38.35,48.01 53.59,48.01 53.59,27.69 38.35,27.69
  pour Bottom (isolate 0.305): 38.35,48.01 53.59,48.01 53.59,27.69 38.35,27.69
GND10  (via drill 0.38)
  Top 0.559: U11.6 60.5,42.44 60.5,42.42 60.17,42.09
  other vias: 59.89,42.04 58.88,42.29 61.67,36.96 61.72,30.1 66.8,30.1 68.33,36.45 64.26,30.1 56.64,30.1 59.18,30.1 56.39,36.2 63.75,47.12 68.33,42.29 54.99,42.55
  pour Top (isolate 0.305): 54.1,48.01 69.34,48.01 69.34,27.69 54.1,27.69
  pour Bottom (isolate 0.305): 54.1,48.01 69.34,48.01 69.34,27.69 54.1,27.69
GND11  (via drill 0.38)
  Top 0.559: U12.6 76.25,42.44 76.25,42.42 75.92,42.09
  other vias: 75.64,42.04 74.63,42.29 77.42,36.96 77.47,30.1 82.55,30.1 84.07,36.45 80.01,30.1 72.39,30.1 74.93,30.1 72.14,36.2 79.5,47.12 84.07,42.29 70.74,42.55
  pour Top (isolate 0.305): 69.85,48.01 85.09,48.01 85.09,27.69 69.85,27.69
  pour Bottom (isolate 0.305): 69.85,48.01 85.09,48.01 85.09,27.69 69.85,27.69
GND12  (via drill 0.38)
  Top 0.559: 92.51,42.44 92,42.44 92,42.42 91.67,42.09
  other vias: 91.39,42.04 90.37,42.29 93.17,36.96 93.22,30.1 98.3,30.1 99.82,36.45 95.76,30.1 88.14,30.1 90.68,30.1 87.88,36.2 95.25,47.12 99.82,42.29 86.49,42.55
  pour Top (isolate 0.305): 85.6,48.01 100.84,48.01 100.84,27.69 85.6,27.69
  pour Bottom (isolate 0.305): 85.6,48.01 100.84,48.01 100.84,27.69 85.6,27.69
GND13  (via drill 0.38)
  Top 0.559: 108.25,42.44 107.75,42.44 107.75,42.42 107.42,42.09
  other vias: 107.14,42.04 106.12,42.29 108.92,36.96 108.97,30.1 114.05,30.1 115.57,36.45 111.51,30.1 103.89,30.1 106.43,30.1 103.63,36.2 111,47.12 115.57,42.29 102.23,42.55
  pour Top (isolate 0.305): 101.35,48.01 116.59,48.01 116.59,27.69 101.35,27.69
  pour Bottom (isolate 0.305): 101.35,48.01 116.59,48.01 116.59,27.69 101.35,27.69
GND14  (via drill 0.38)
  Top 0.559: 13.77,63.27 13.26,63.27 13.26,63.25 12.93,62.92
  other vias: 12.65,62.87 11.63,63.12 14.43,57.78 14.48,50.93 19.56,50.93 21.08,57.28 17.02,50.93 9.4,50.93 11.94,50.93 9.14,57.02 16.51,67.94 21.08,63.12 7.75,63.37
  pour Top (isolate 0.305): 6.86,68.83 22.1,68.83 22.1,48.51 6.86,48.51
  pour Bottom (isolate 0.305): 6.86,68.83 22.1,68.83 22.1,48.51 6.86,48.51
GND15  (via drill 0.38)
  Top 0.559: 29.52,63.27 29.01,63.27 29.01,63.25 28.68,62.92